# Altium PCB praline.PcbDoc (part 1 of 8)
Units mm, origin at the board's own origin, x right, y up, seen from the top; angles counter-clockwise.
Board outline 152.4 x 101.6 mm, 6 copper layers (In2.Cu, F.Cu, B.Cu, In1.Cu, In3.Cu, In4.Cu); 581 components, 490 nets, 2812 pads, 953 vias.
Unrouted connection lines stored in the file: 404.
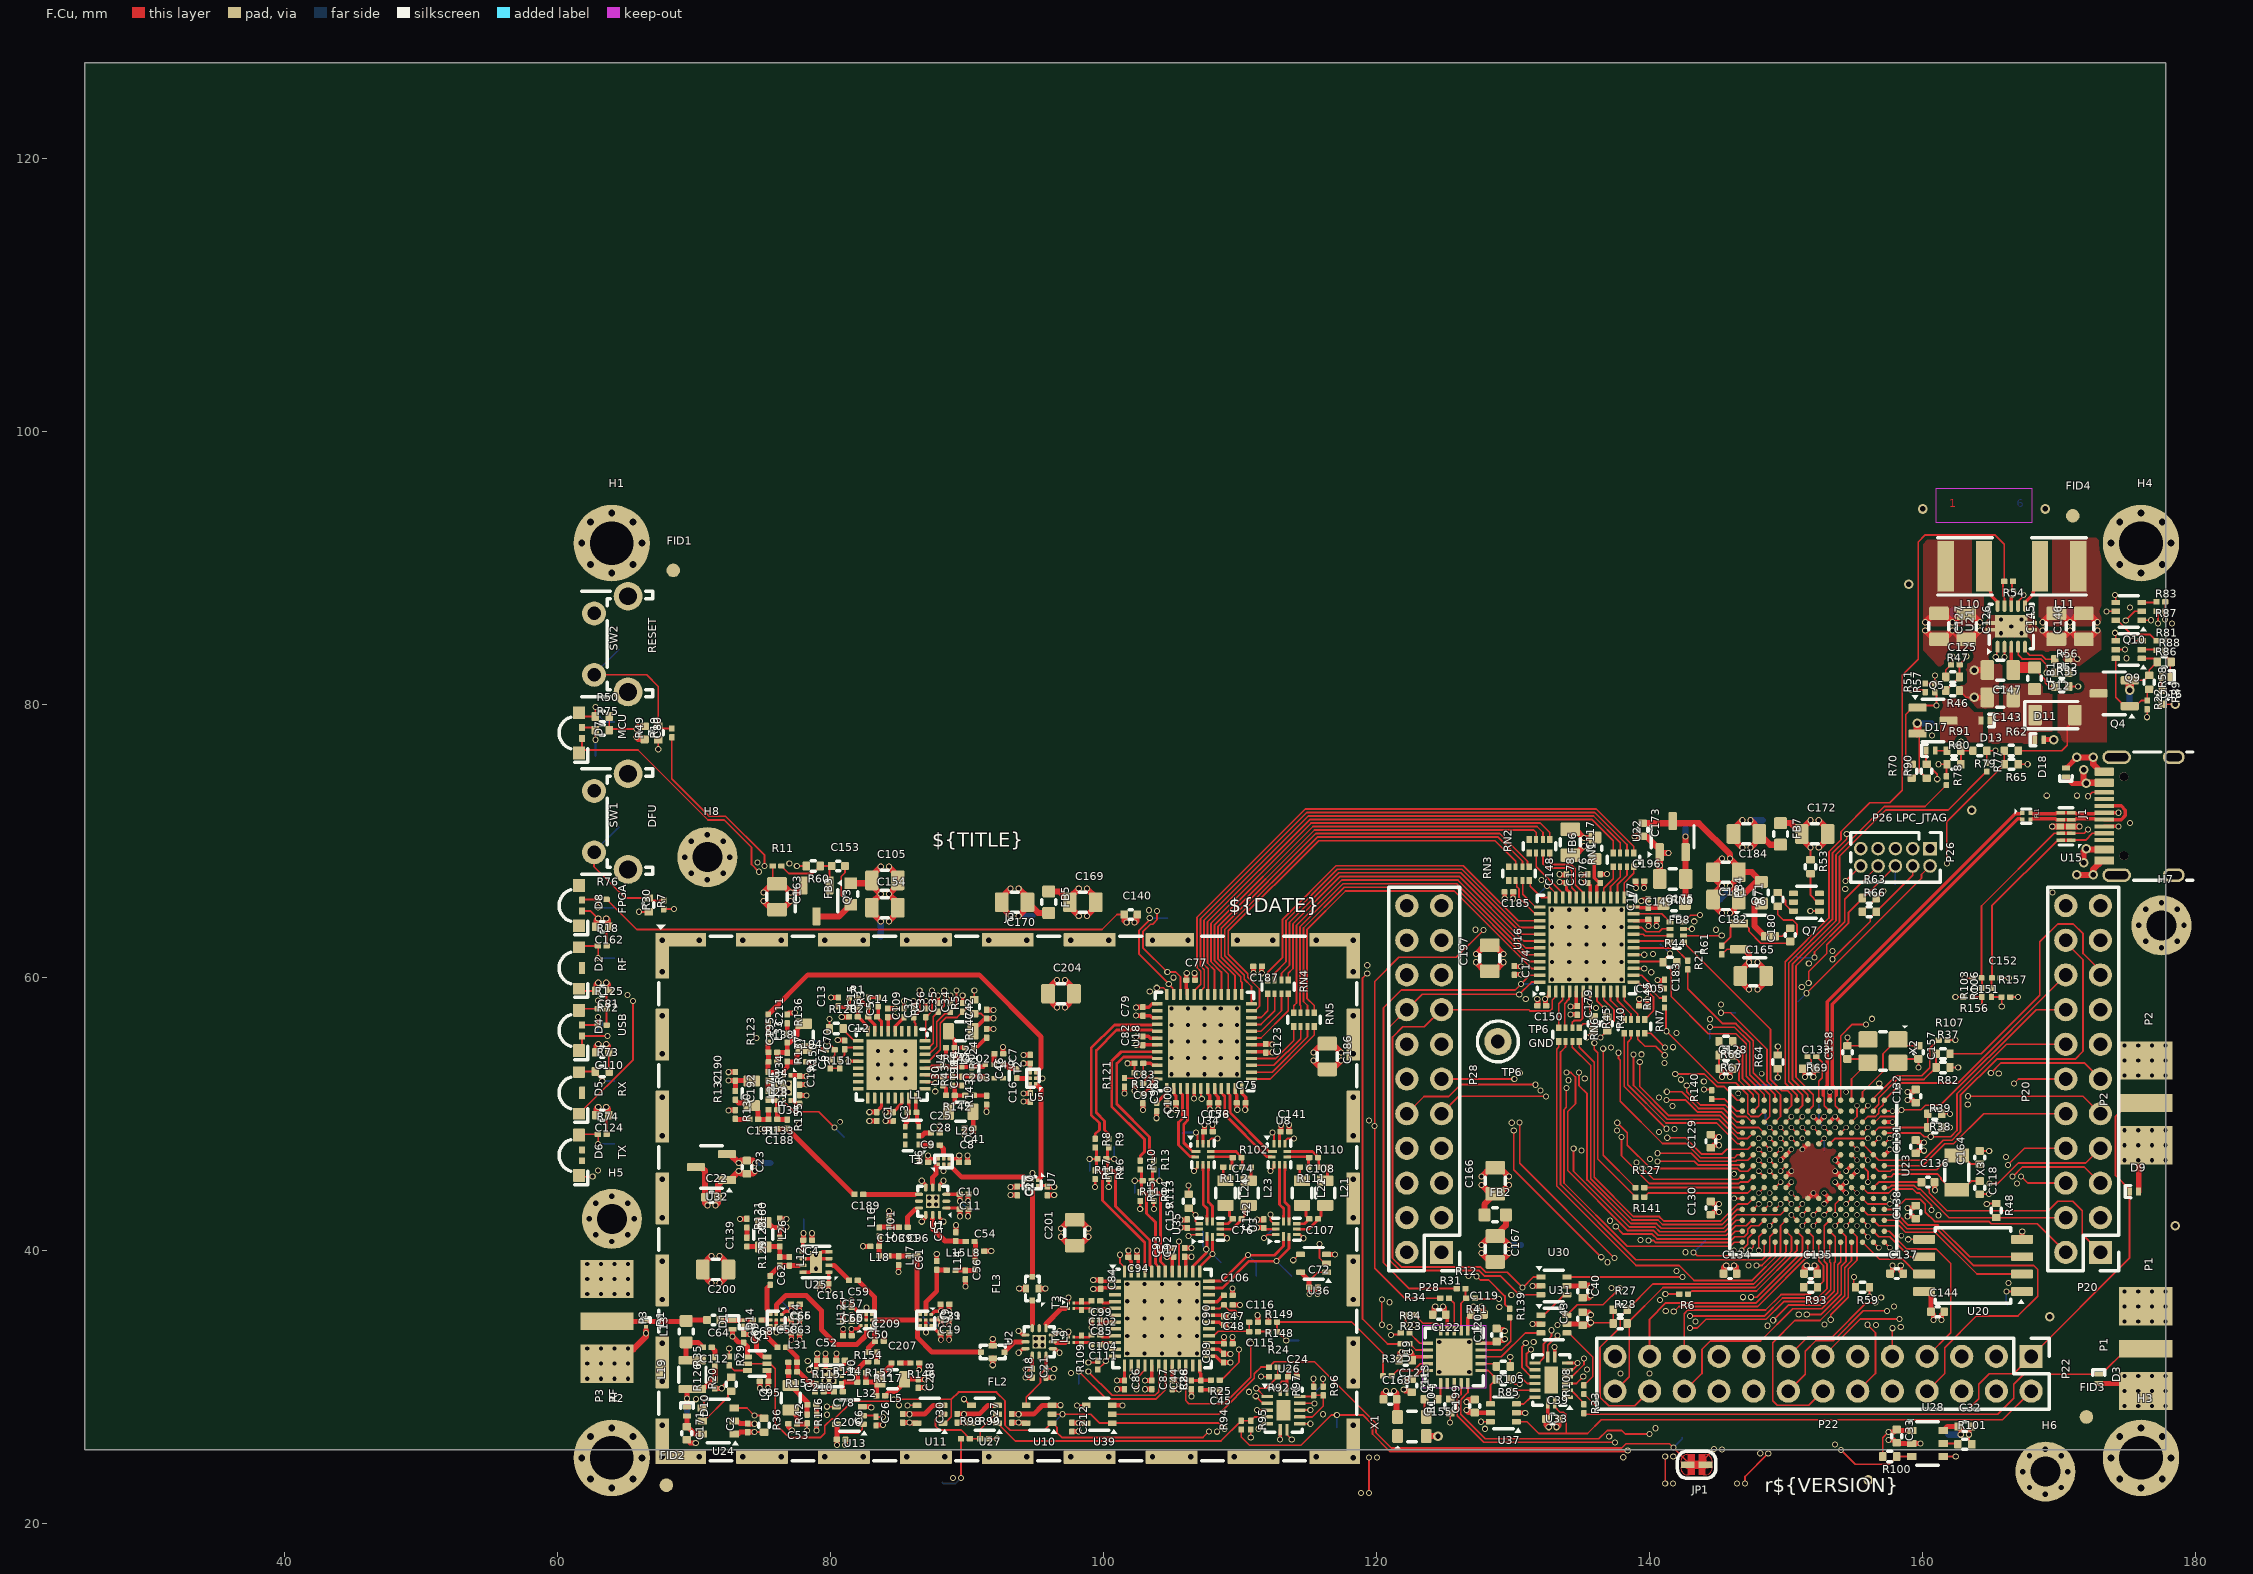
[diagram p0: F.Cu view]
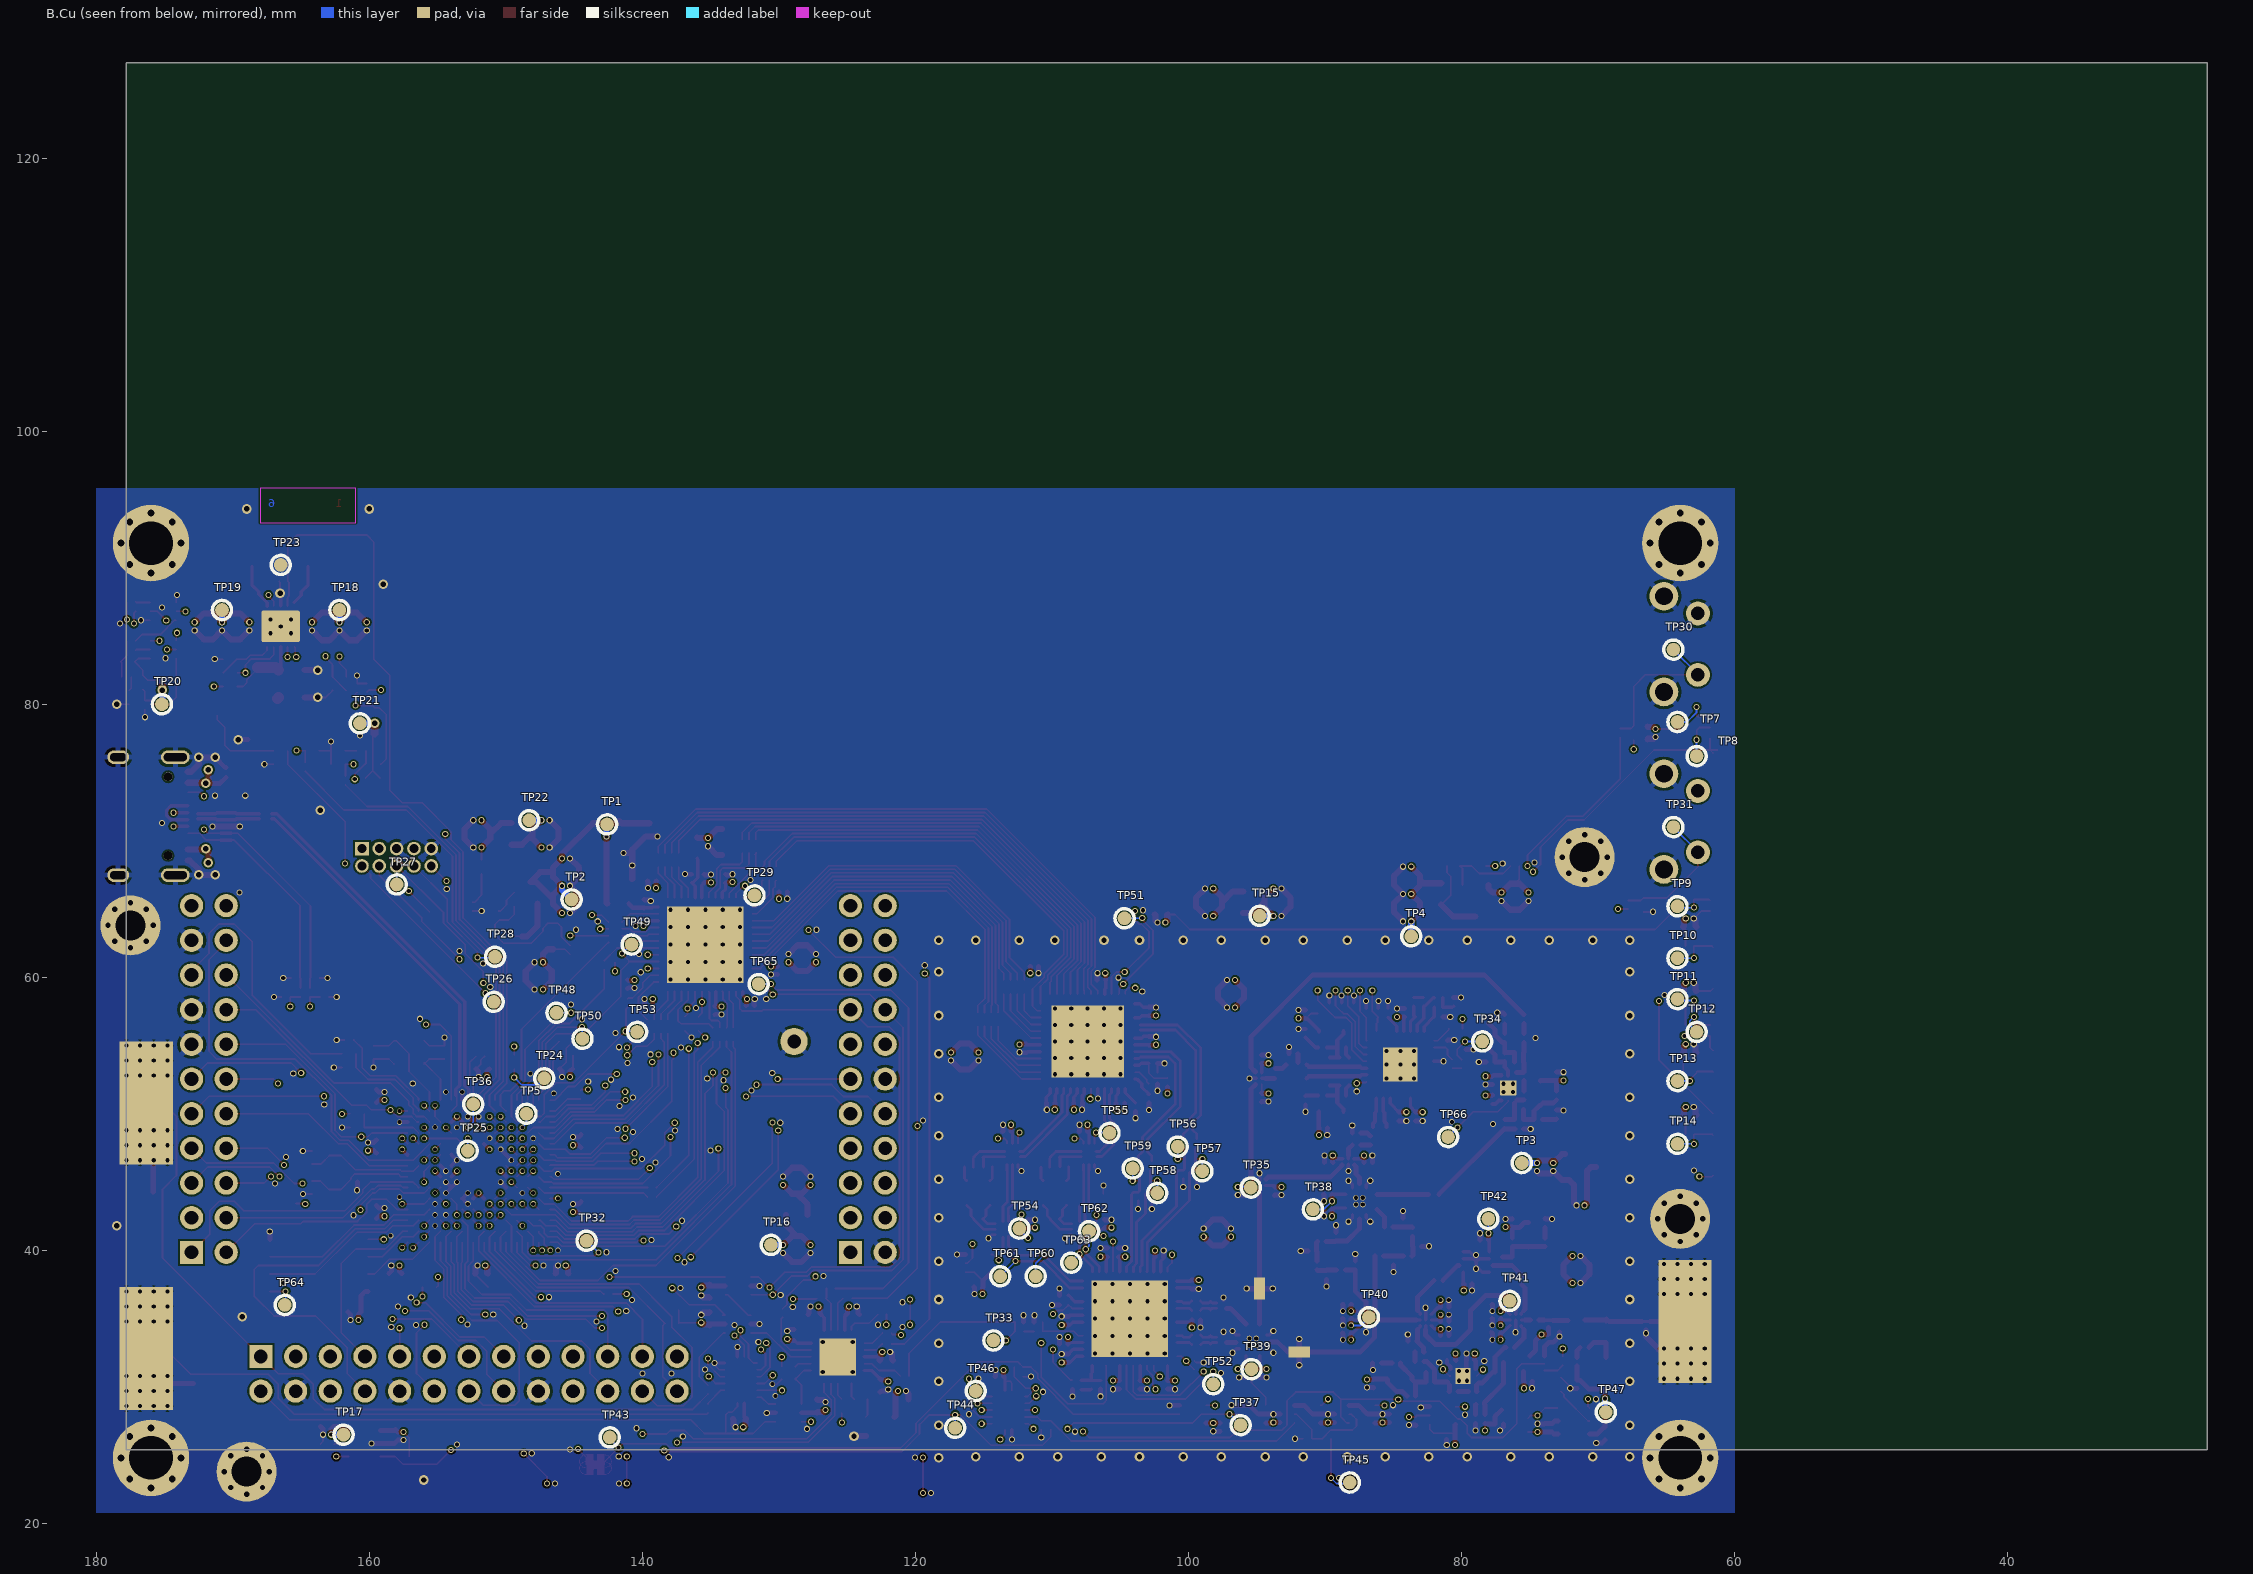
[diagram p1: B.Cu view, seen from below]
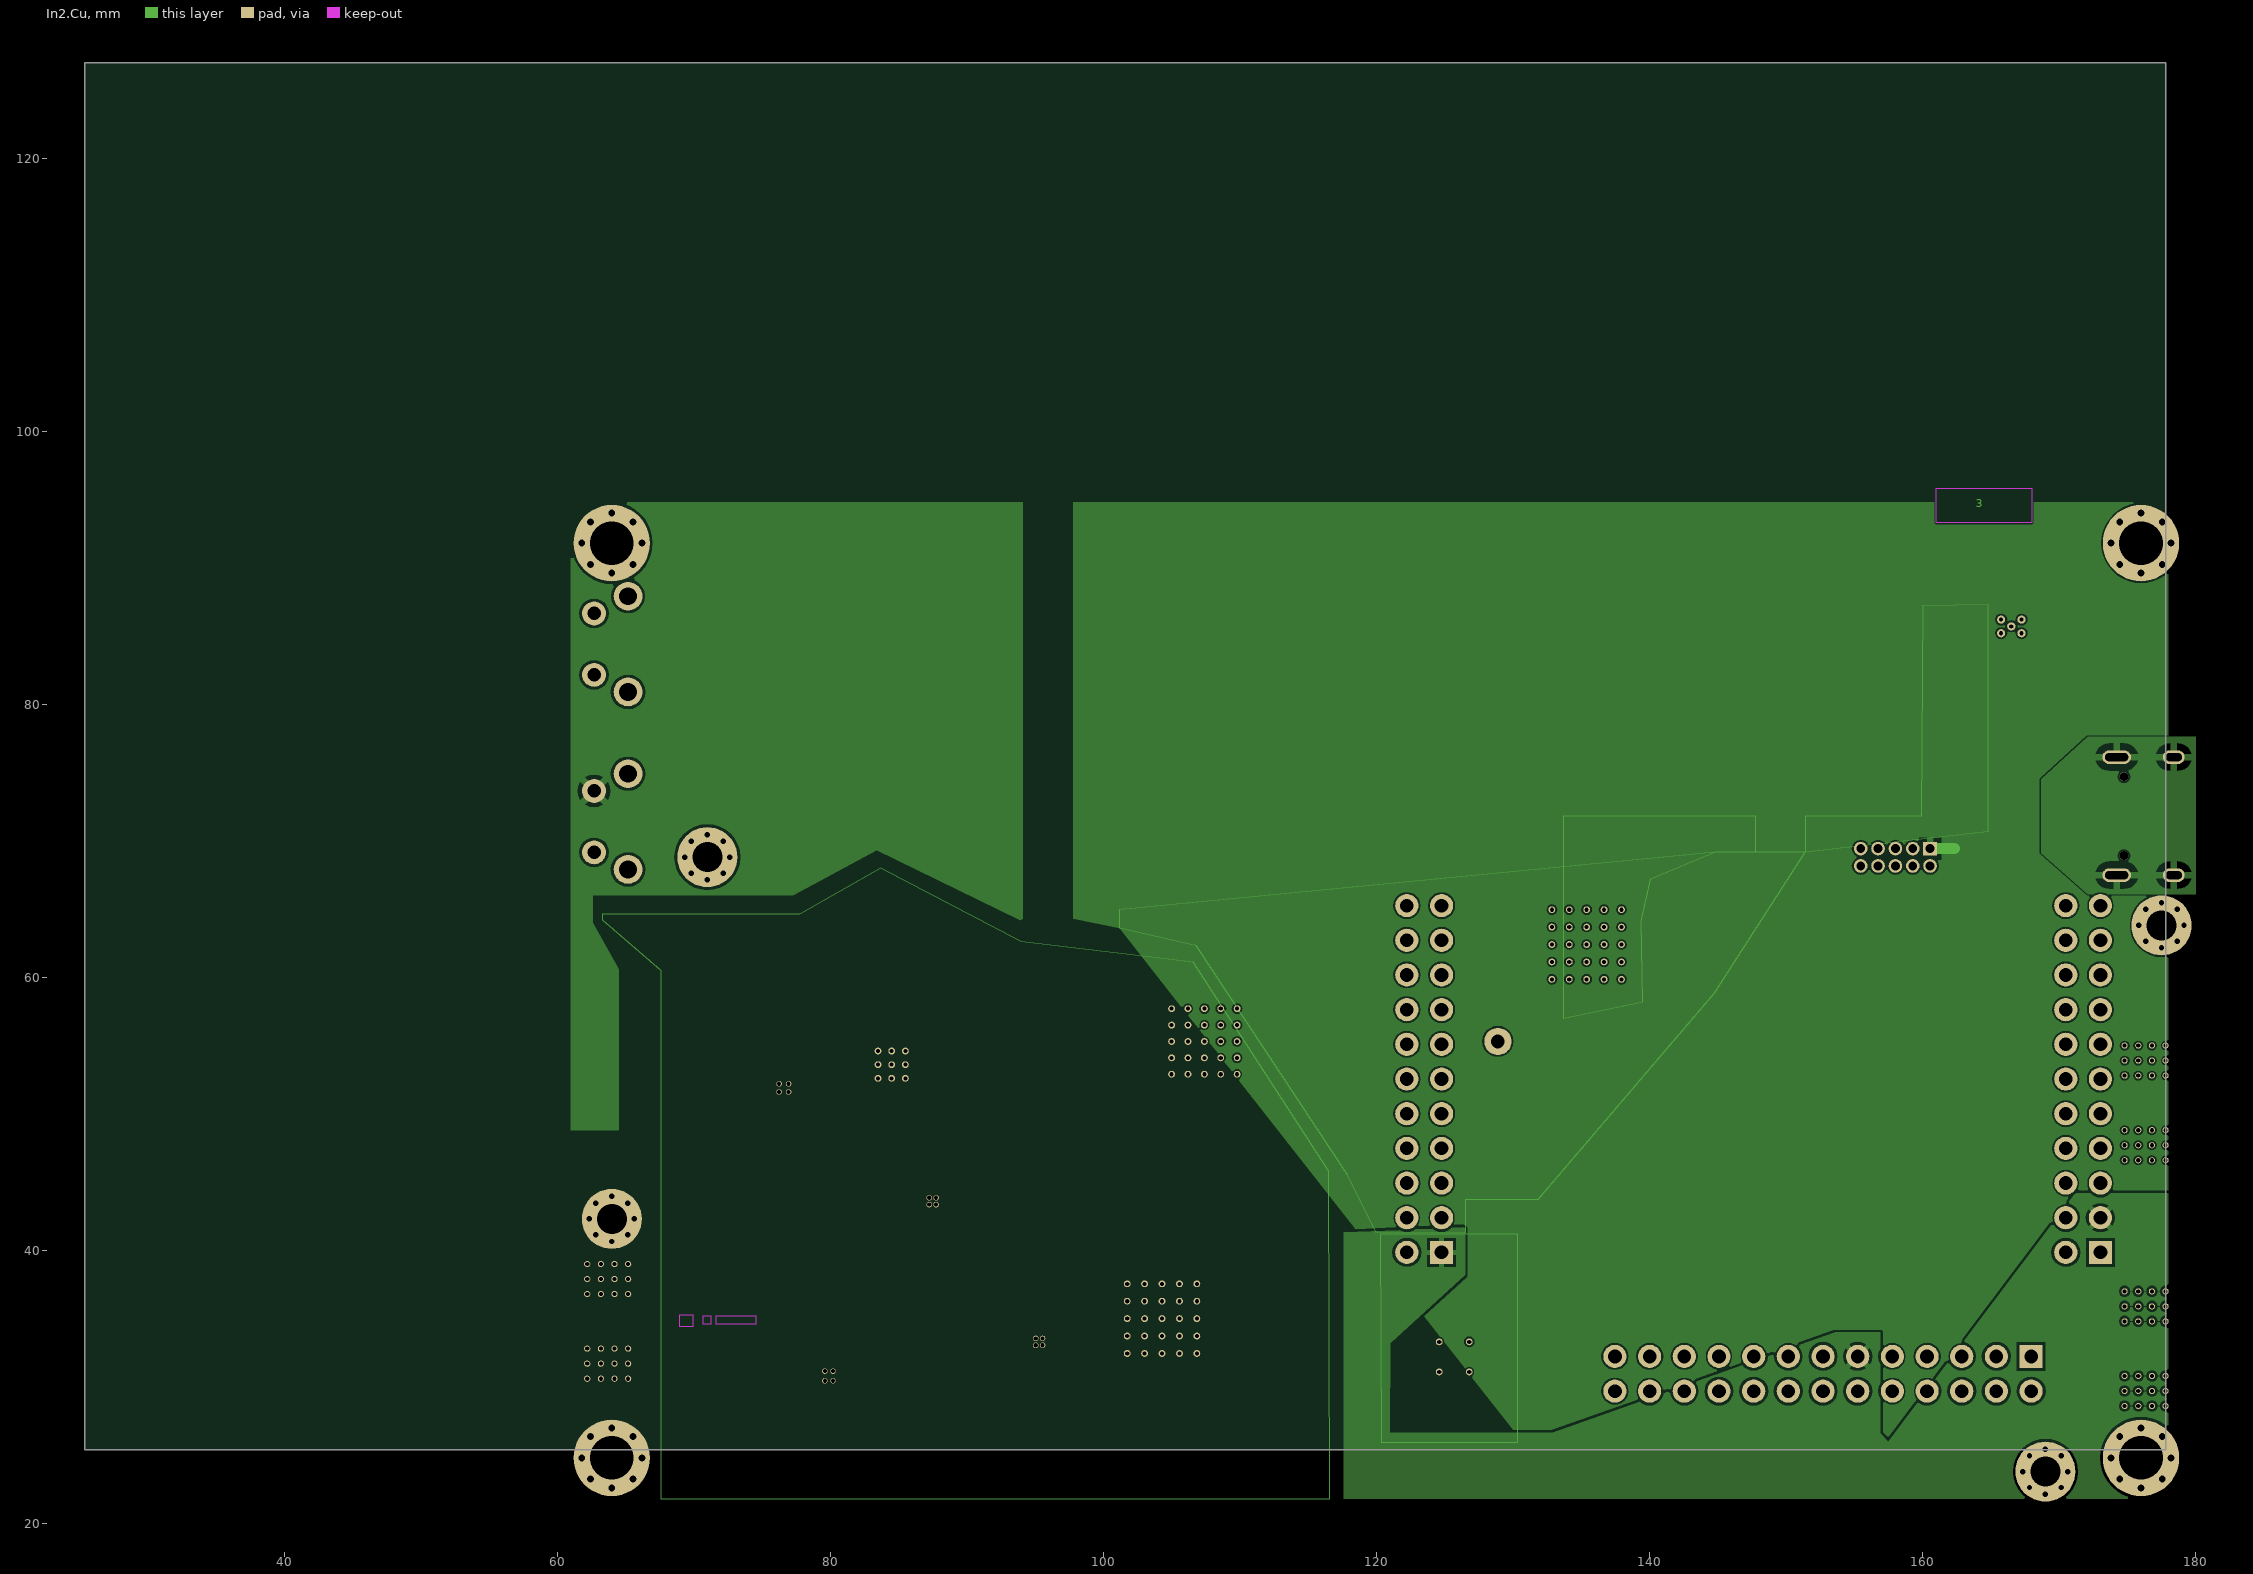
[diagram p2: In2.Cu]
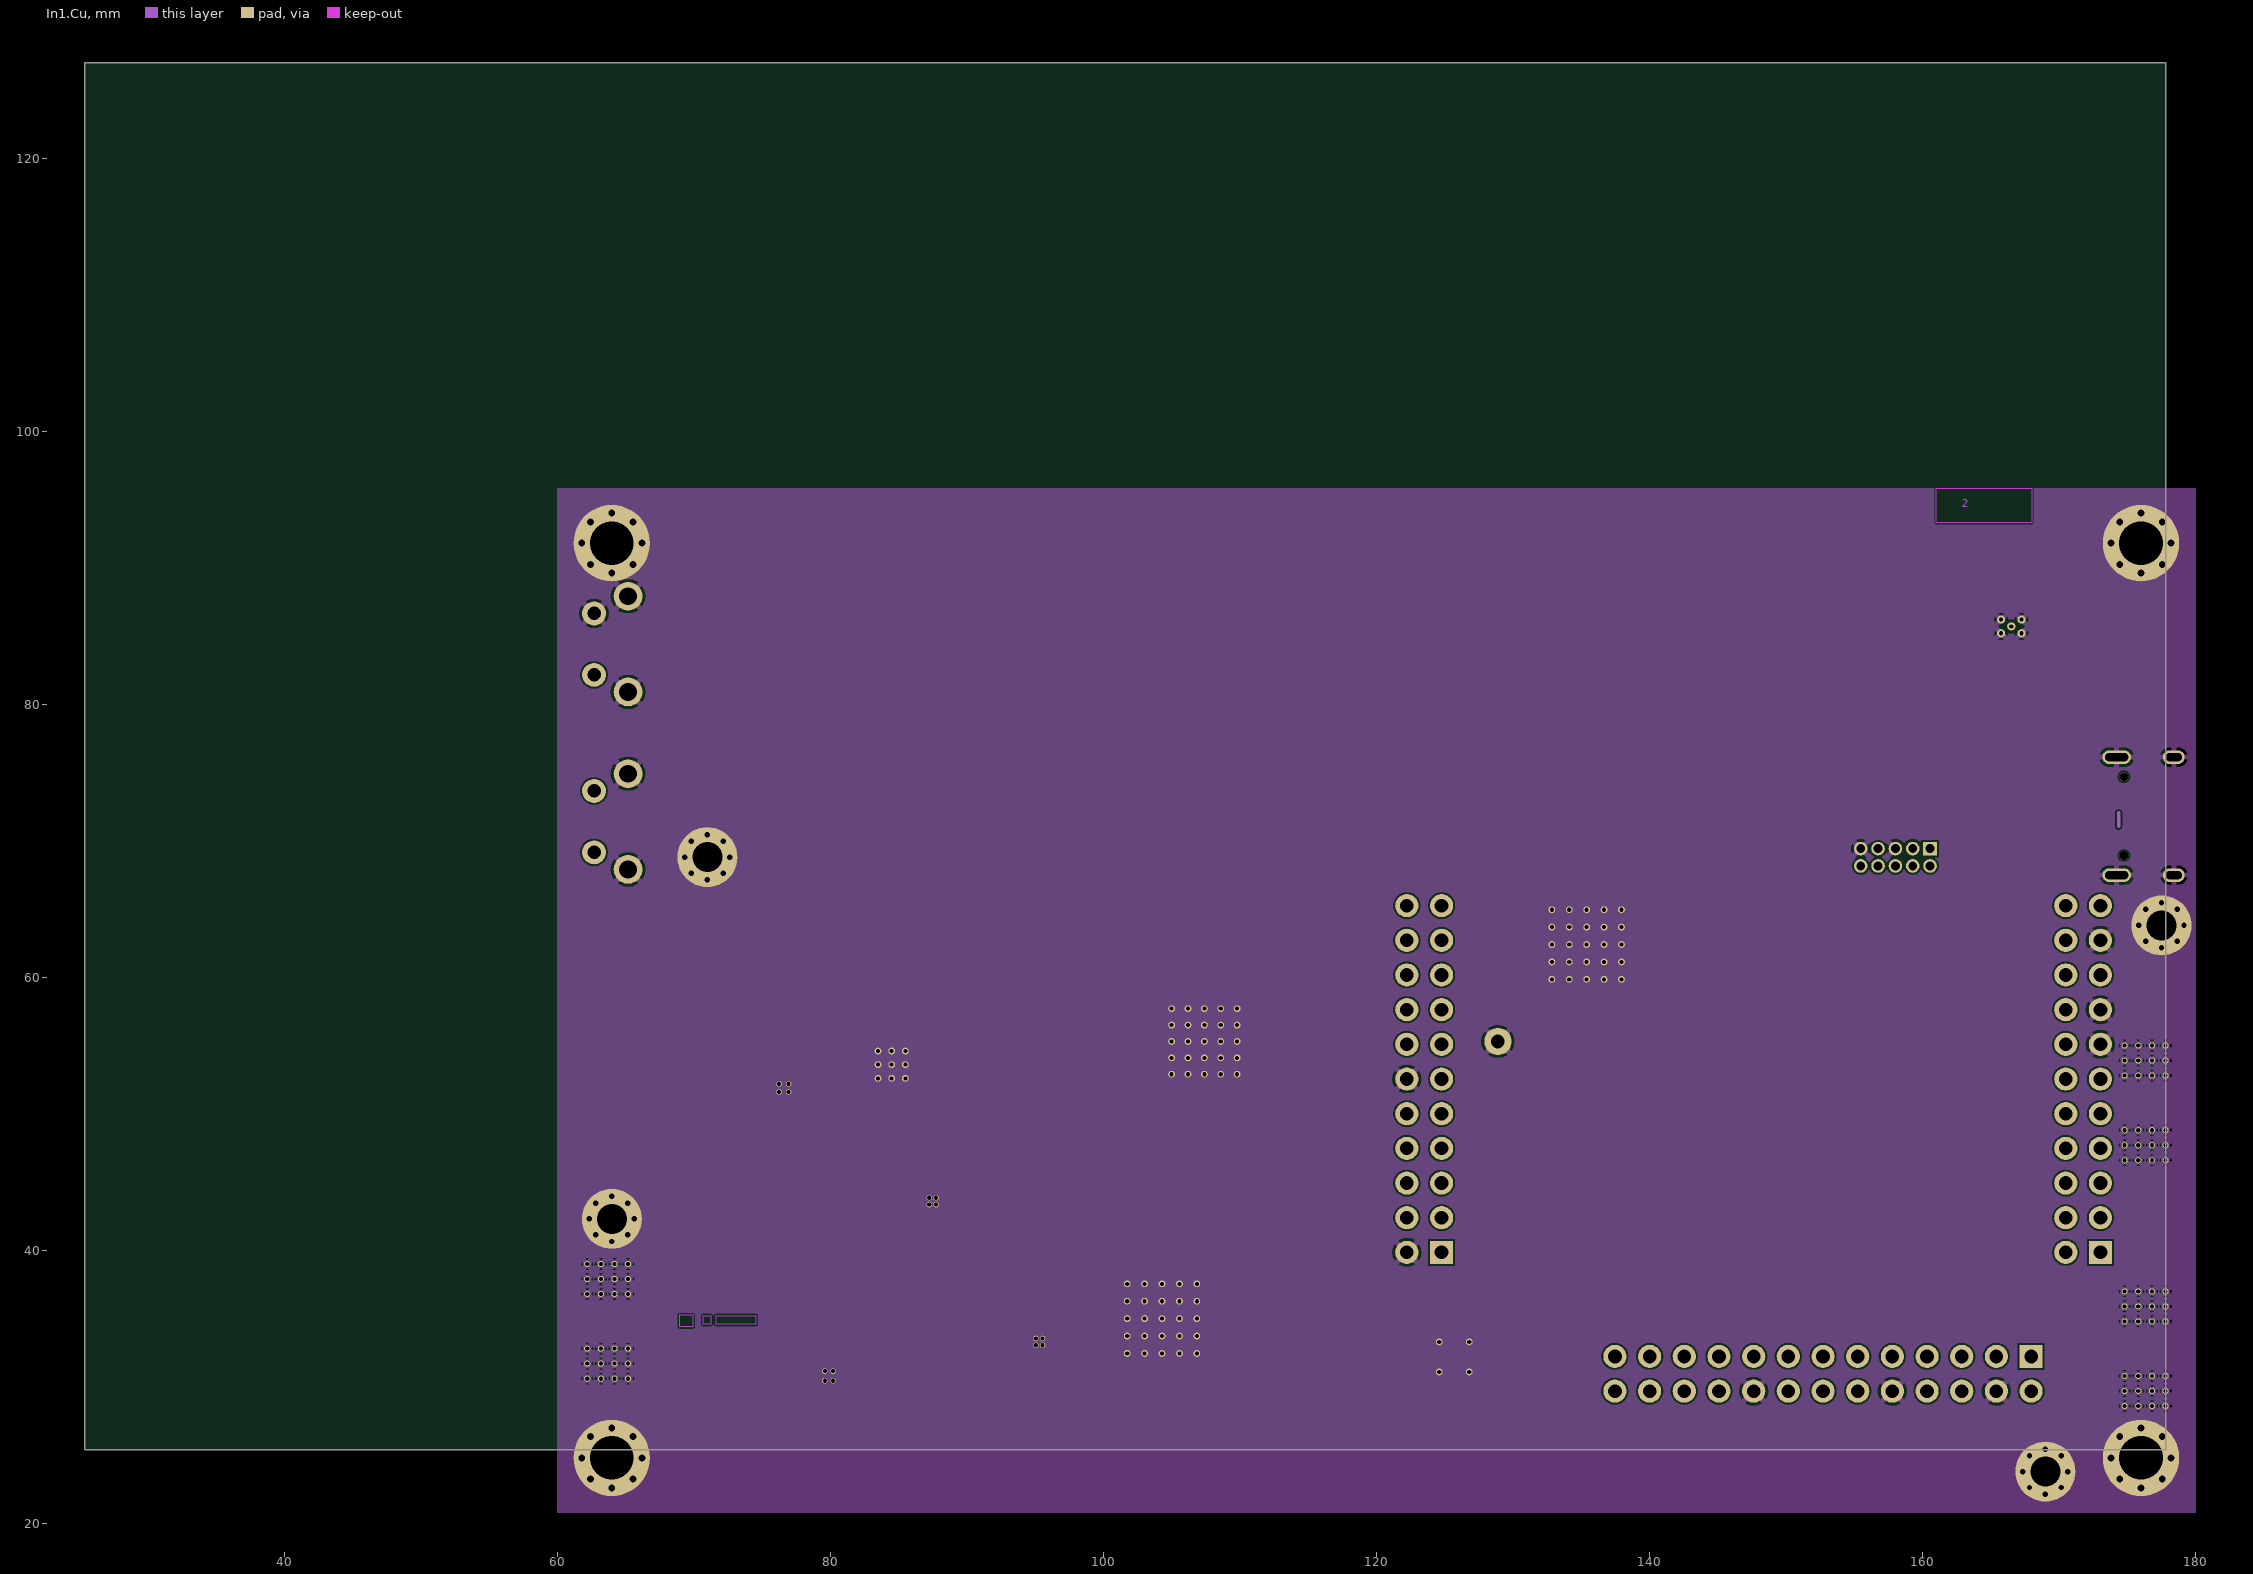
[diagram p3: In1.Cu]
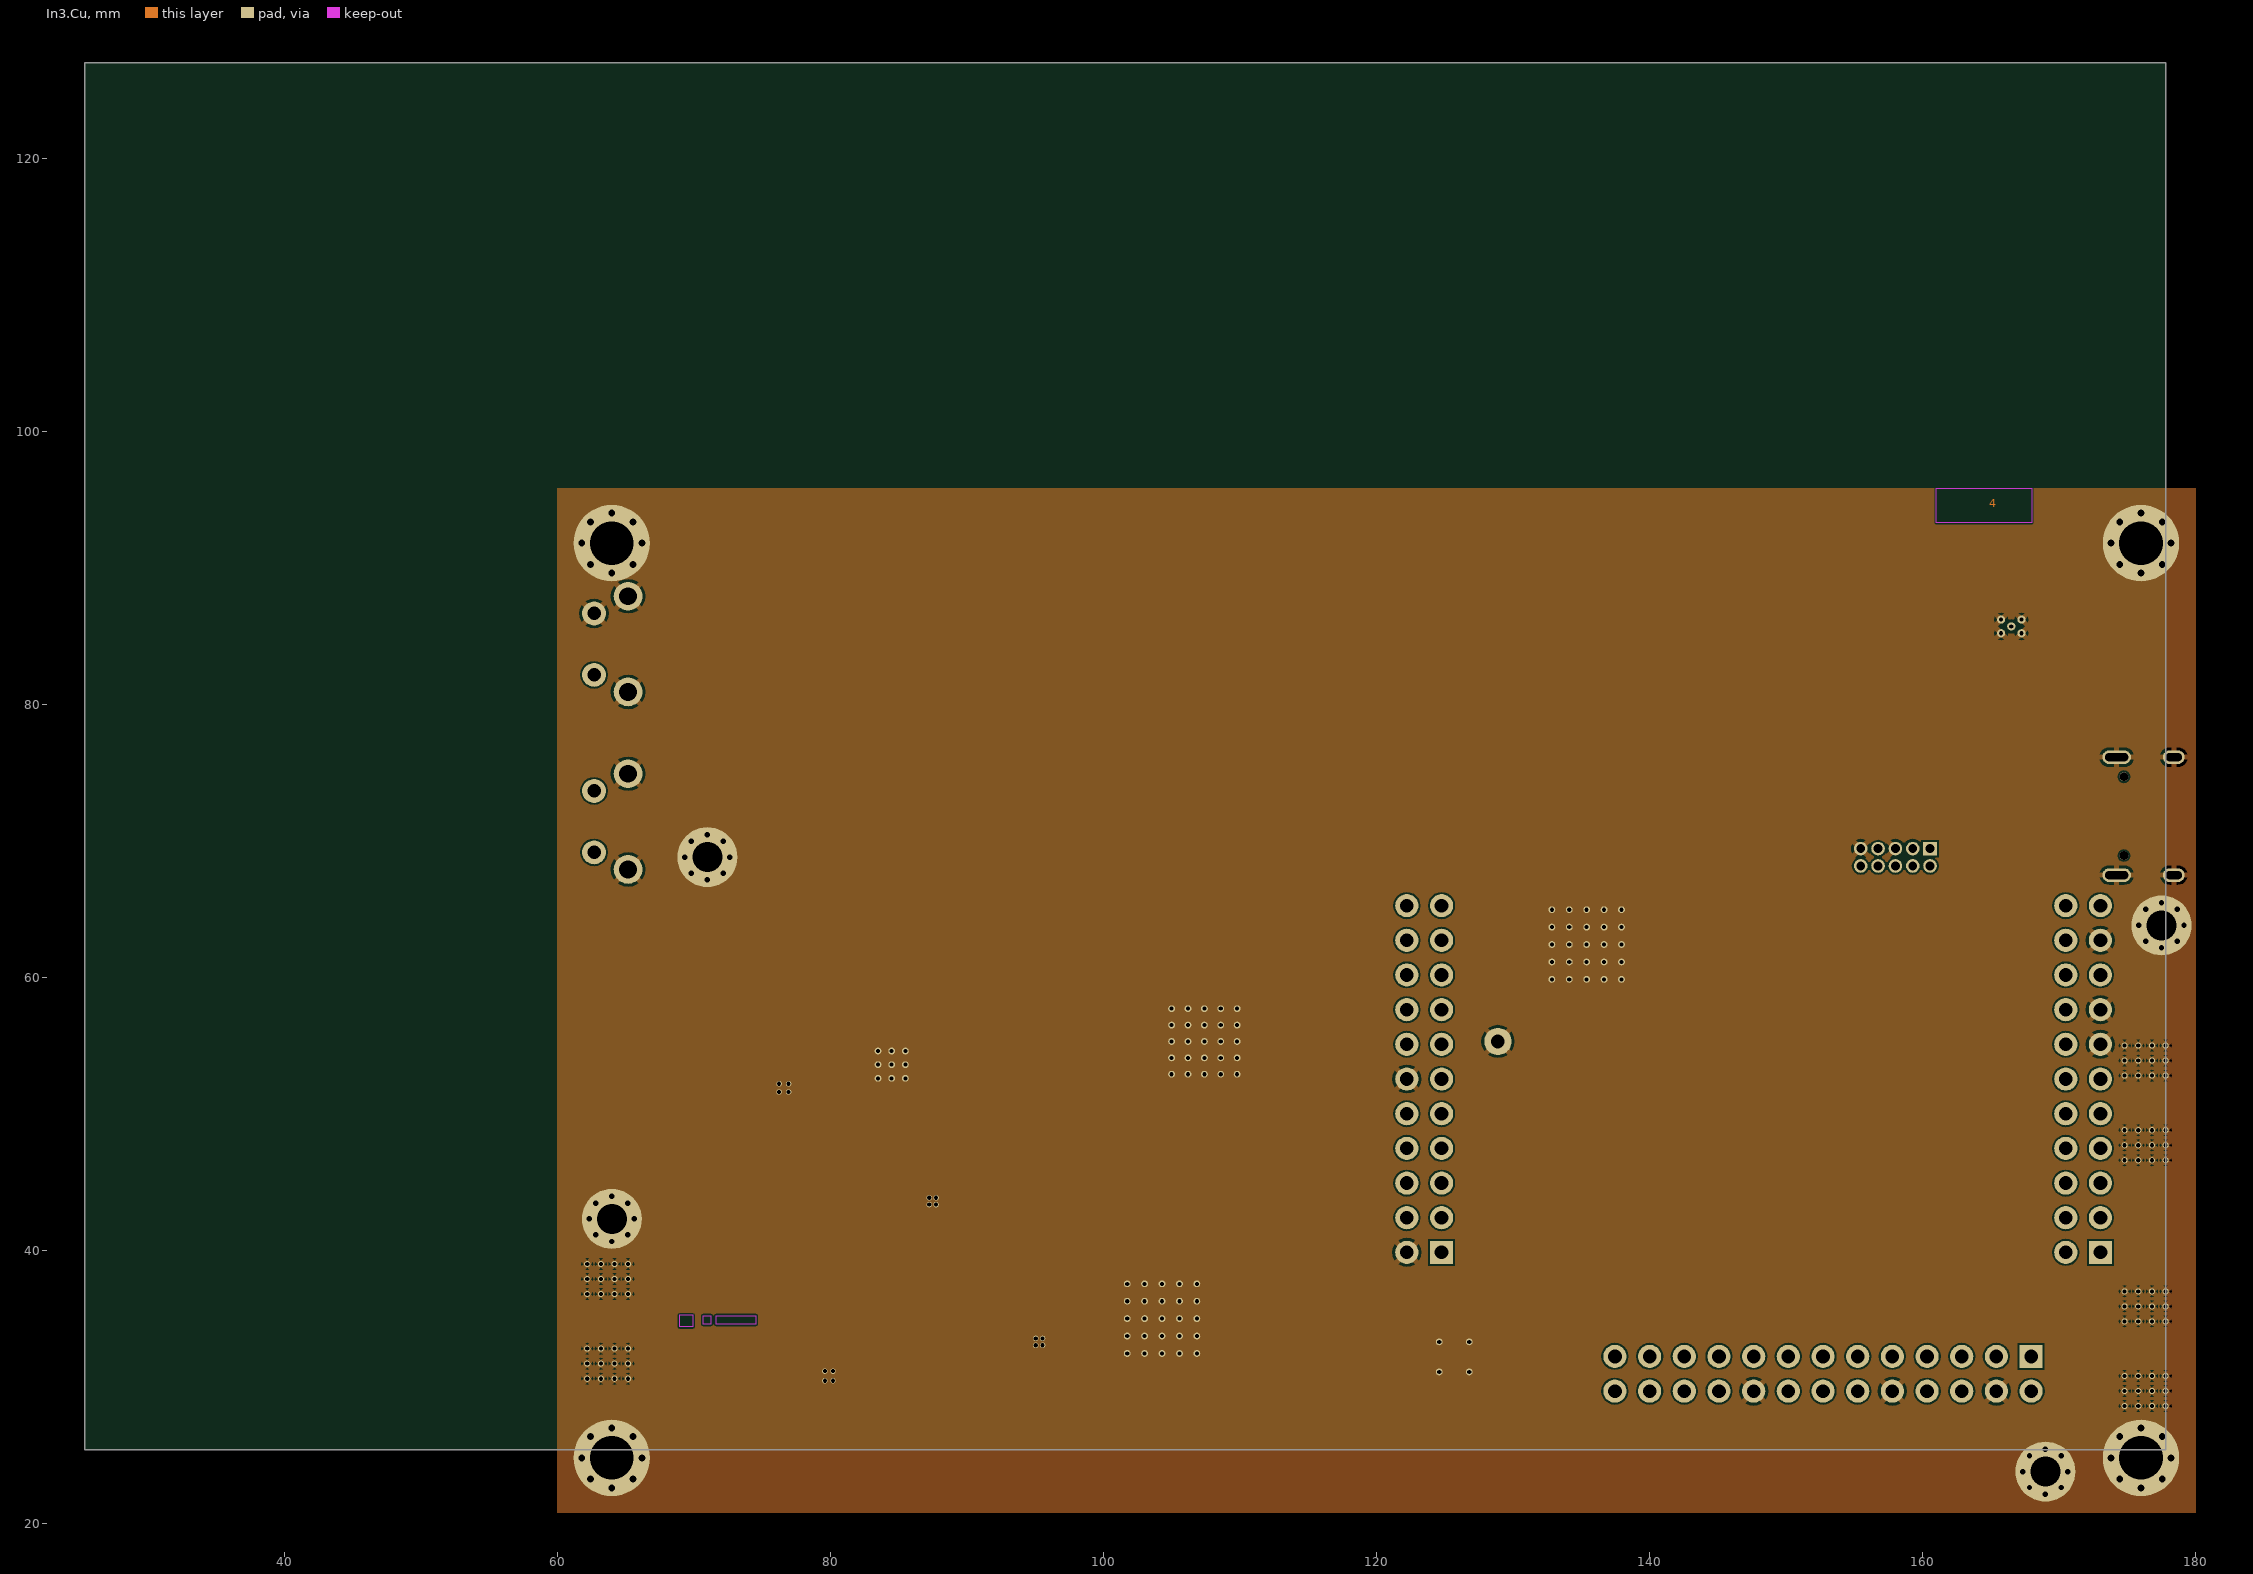
[diagram p4: In3.Cu]
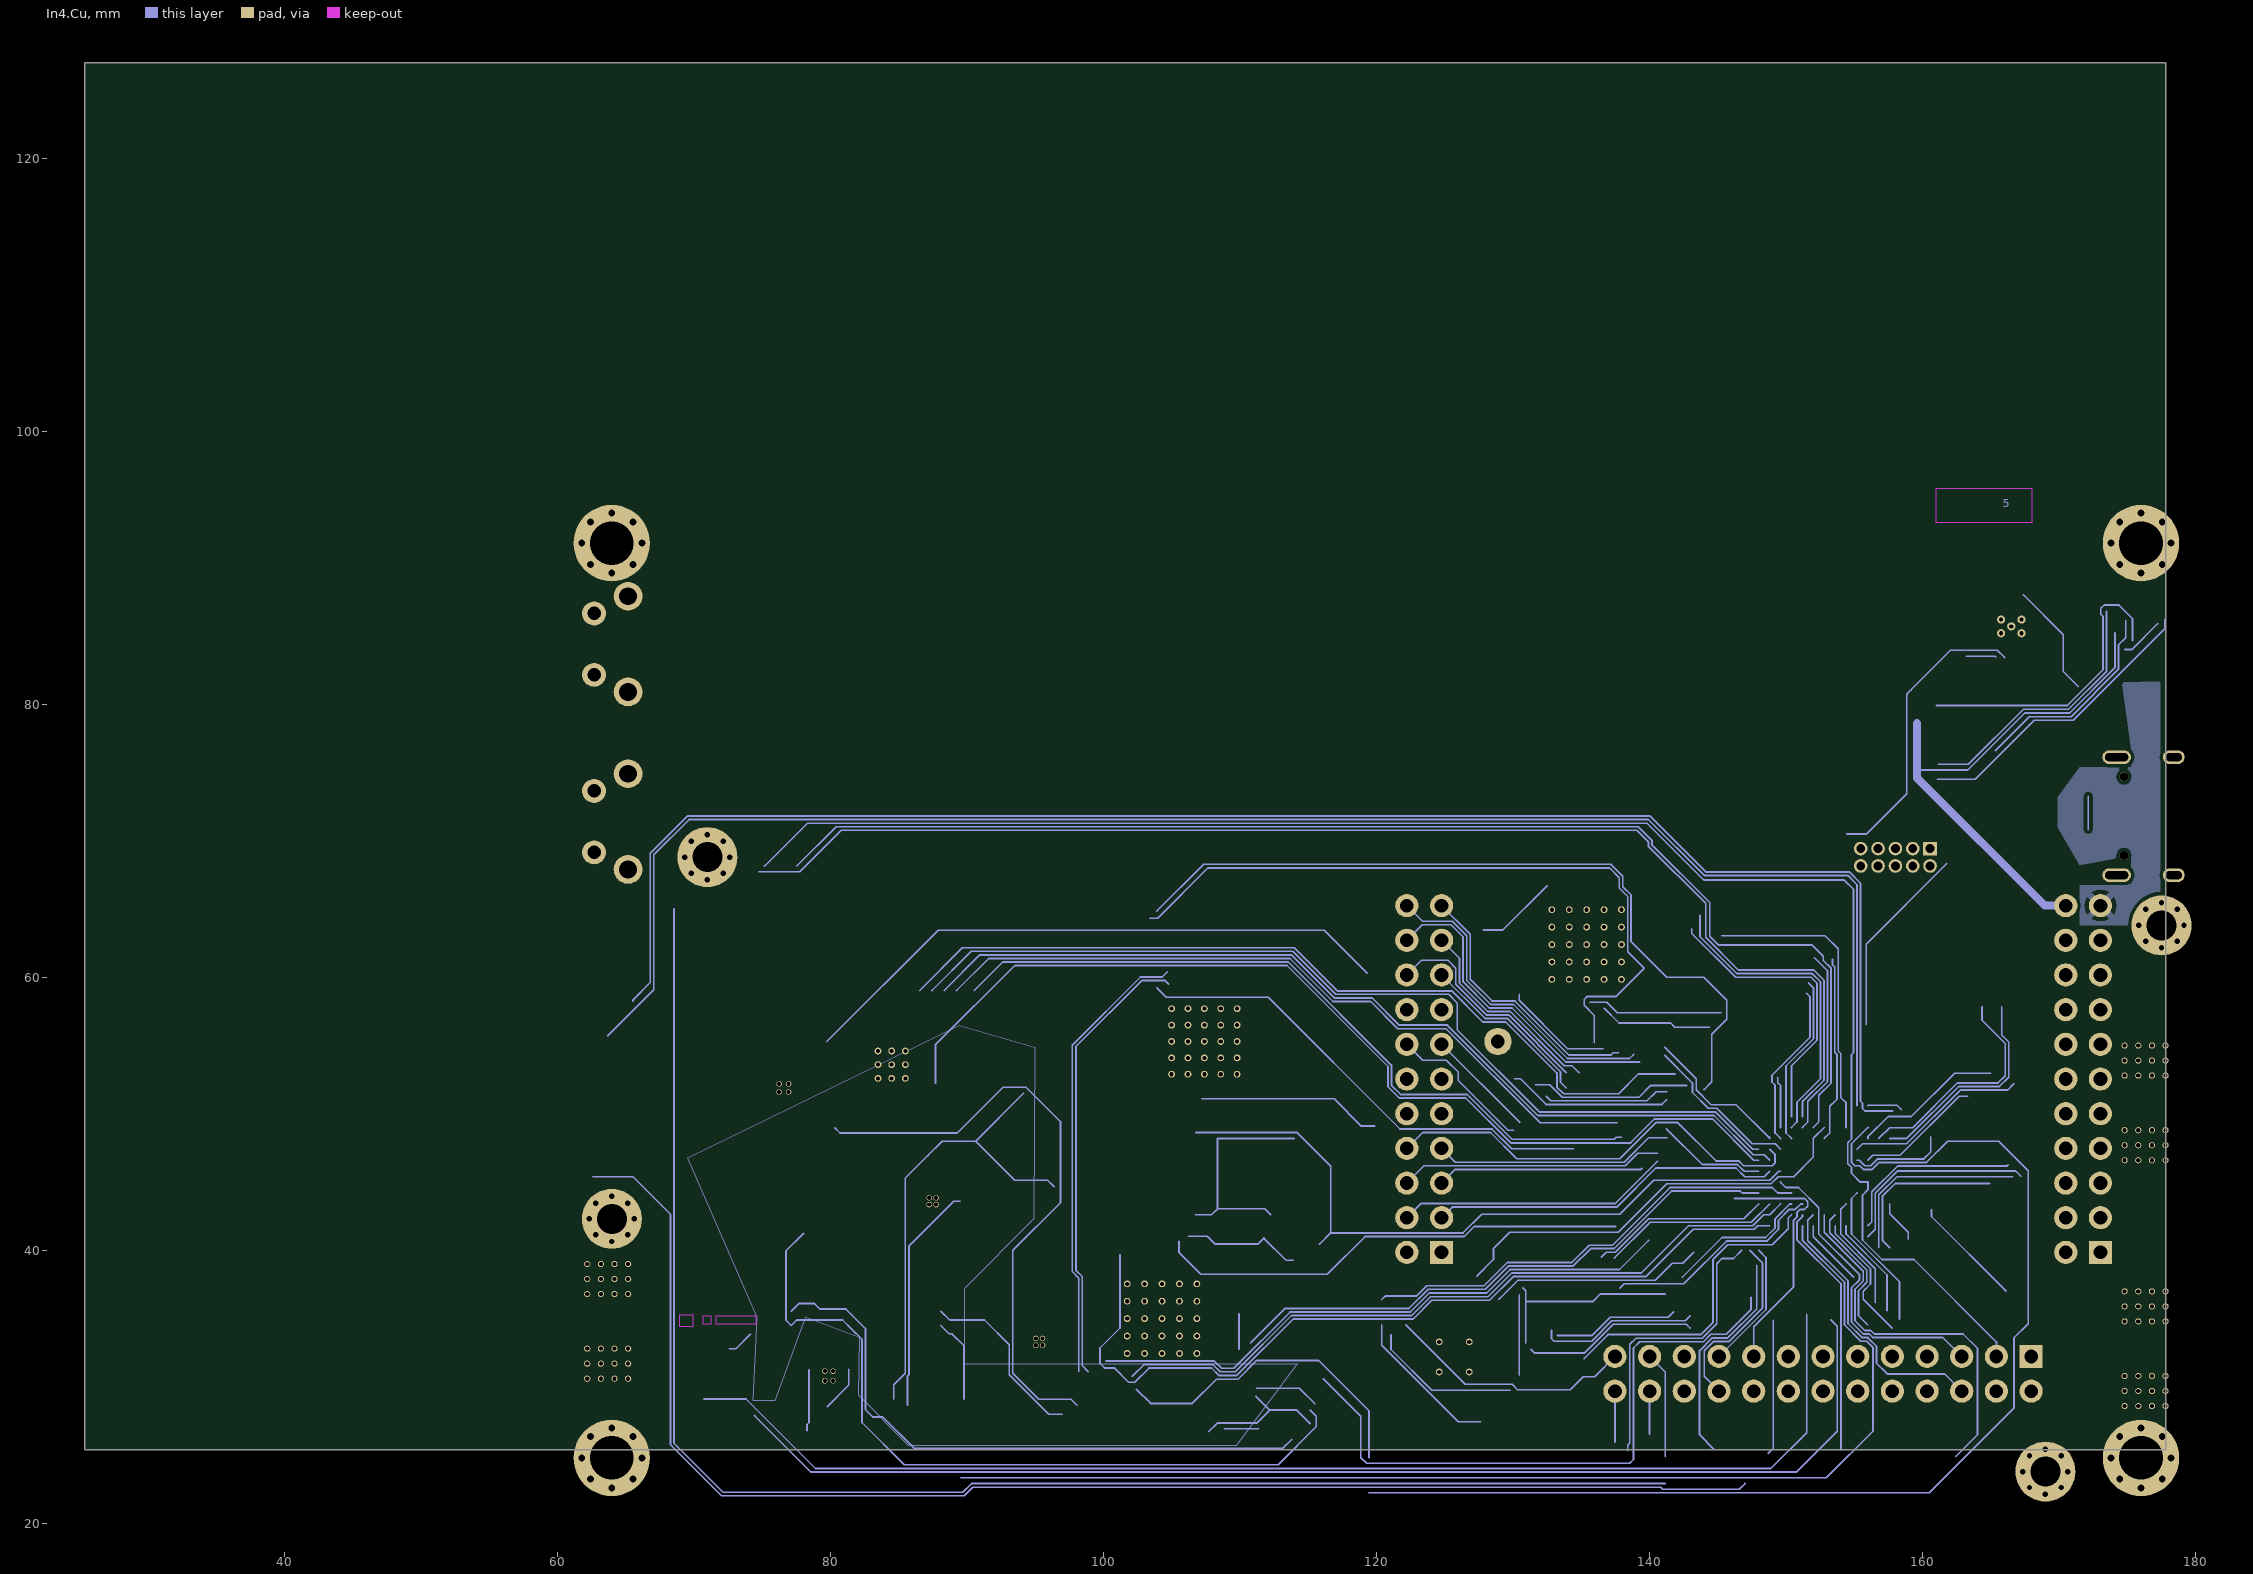
[diagram p5: In4.Cu]

## Layer stack, top to bottom
In2.Cu: signal copper 0.0356
Dielectric3: dielectric 0.32, FR-4, Dk 4.8
F.Mask: solder mask 0.0102, Solder Resist, Dk 3.5
F.Cu: signal copper 0.0356
Dielectric 1: dielectric 0.32, FR-4, Dk 4.8
B.Cu: signal copper 0.0356
B.Mask: solder mask 0.0102, Solder Resist, Dk 3.5
In1.Cu: signal copper 0.0356
Dielectric2: dielectric 0.32, FR-4, Dk 4.8
In3.Cu: signal copper 0.0356
Dielectric4: dielectric 0.32, FR-4, Dk 4.8
In4.Cu: signal copper 0.0356
Dielectric5: dielectric 0.32, FR-4, Dk 4.8

## Board outline
25.4,25.4 177.8,25.4 177.8,127 25.4,127

## Design rules (kind name [scope] priority, off if disabled: settings)
Clearance "Clearence 0.5_PadClass" [InPadClass('Pad Class Clearance 0.5')] p1: gap=0.5 ignorepadtopadclearanceinfootprint=FALSE
Clearance "Clearence 0.3_Polygon" [InNamedPolygon('F.Cu-VCC') OR InNamedPolygon('F.Cu-+1V2') OR InNamedPolygon('F.Cu-GND')] p2: gap=0.3 ignorepadtopadclearanceinfootprint=FALSE
Clearance "Clearence 0.25_Polygon" [InNamedPolygon('F.Cu-Net-(D13-A)') OR InNamedPolygon('F.Cu-Net-(D11-K)') OR InNamedPolygon('F.Cu-/Microcontroller/VBUS_SAFE') OR InNamedPolygon('In4.Cu-/Power/VBUS')] p3: gap=0.25 ignorepadtopadclearanceinfootprint=FALSE
Clearance "Clearence 0.2_Polygon" [InNamedPolygon('F.Cu-VCC-1') OR InNamedPolygon('In2.Cu-3V3AUX') OR InNamedPolygon('In2.Cu-+1V2') OR InNamedPolygon('In2.Cu-3V3LED') OR InNamedPolygon('In2.Cu-1V2FPGA') OR InNamedPolygon('In2.Cu-3V3CLK') OR InNamedPolygon('In2.Cu-3V3FPGA') OR InNamedPolygon('In4.Cu-2V5RF')] p4: gap=0.2 ignorepadtopadclearanceinfootprint=FALSE
Clearance "Clearence 0.127_Polygon" [InNamedPolygon('B.Cu-GND') OR InNamedPolygon('In1.Cu-GND') OR InNamedPolygon('In3.Cu-GND') OR InNamedPolygon('In2.Cu-VCC') OR InNamedPolygon('In2.Cu-VAA') OR InNamedPolygon('In2.Cu-GND')] p5: gap=0.127 ignorepadtopadclearanceinfootprint=FALSE
Clearance "Clearence 0.127_NetClass" [InNetClass('Default') OR InNetClass('diff100') OR InNetClass('diff90')] p6: gap=0.127 ignorepadtopadclearanceinfootprint=FALSE
Clearance "Clearence 0.05_PadClass" [InPadClass('Pad Class Clearance 0.05')] p7: gap=0.05 ignorepadtopadclearanceinfootprint=FALSE
Clearance "Clearence 0.04_PadClass" [InPadClass('Pad Class Clearance 0.04')] p8: gap=0.04 ignorepadtopadclearanceinfootprint=FALSE
MinimumSolderMaskSliver [All] p1: minsoldermaskwidth=0
PolygonConnect Polygon_In4.Cu-2V5RF_ConnectDirect [IsNamedPolygon('In4.Cu-2V5RF') vs IsVia or IsSMTPin] p1: connectstyle=Direct reliefconductorwidth=0.254 reliefentries=4 polygonreliefangle="90 Angle" airgapwidth=0.254
PolygonConnect Polygon_In4.Cu-2V5RF_ConnectRelief45 [IsNamedPolygon('In4.Cu-2V5RF') vs IsThruPin and (PadShape_AllLayers = 'Round')] p2: connectstyle=Relief reliefconductorwidth=0.5 reliefentries=4 polygonreliefangle="45 Angle" airgapwidth=0.5
PolygonConnect Polygon_In4.Cu-2V5RF_ConnectRelief90 [IsNamedPolygon('In4.Cu-2V5RF') vs IsThruPin and (PadShape_AllLayers <> 'Round')] p3: connectstyle=Relief reliefconductorwidth=0.5 reliefentries=4 polygonreliefangle="90 Angle" airgapwidth=0.5
PolygonConnect Polygon_In4.Cu-/Power/VBUS_ConnectDirect [IsNamedPolygon('In4.Cu-/Power/VBUS') vs IsVia] p4: connectstyle=Direct reliefconductorwidth=0.254 reliefentries=4 polygonreliefangle="90 Angle" airgapwidth=0.254
PolygonConnect Polygon_In4.Cu-/Power/VBUS_ConnectRelief45 [IsNamedPolygon('In4.Cu-/Power/VBUS') vs (IsThruPin or IsSMTPin) and (PadShape_AllLayers = 'Round')] p5: connectstyle=Relief reliefconductorwidth=0.5 reliefentries=4 polygonreliefangle="45 Angle" airgapwidth=0.3
PolygonConnect Polygon_In4.Cu-/Power/VBUS_ConnectRelief90 [IsNamedPolygon('In4.Cu-/Power/VBUS') vs (IsThruPin or IsSMTPin) and (PadShape_AllLayers <> 'Round')] p6: connectstyle=Relief reliefconductorwidth=0.5 reliefentries=4 polygonreliefangle="90 Angle" airgapwidth=0.3
PolygonConnect Polygon_In2.Cu-3V3FPGA_ConnectDirect [IsNamedPolygon('In2.Cu-3V3FPGA') vs IsVia] p7: connectstyle=Direct reliefconductorwidth=0.254 reliefentries=4 polygonreliefangle="90 Angle" airgapwidth=0.254
PolygonConnect Polygon_In2.Cu-3V3FPGA_ConnectRelief45 [IsNamedPolygon('In2.Cu-3V3FPGA') vs (IsThruPin or IsSMTPin) and (PadShape_AllLayers = 'Round')] p8: connectstyle=Relief reliefconductorwidth=0.5 reliefentries=4 polygonreliefangle="45 Angle" airgapwidth=0.5
PolygonConnect Polygon_In2.Cu-3V3FPGA_ConnectRelief90 [IsNamedPolygon('In2.Cu-3V3FPGA') vs (IsThruPin or IsSMTPin) and (PadShape_AllLayers <> 'Round')] p9: connectstyle=Relief reliefconductorwidth=0.5 reliefentries=4 polygonreliefangle="90 Angle" airgapwidth=0.5
PolygonConnect Polygon_In2.Cu-3V3CLK_ConnectDirect [IsNamedPolygon('In2.Cu-3V3CLK') vs IsVia] p10: connectstyle=Direct reliefconductorwidth=0.254 reliefentries=4 polygonreliefangle="90 Angle" airgapwidth=0.254
PolygonConnect Polygon_In2.Cu-3V3CLK_ConnectRelief45 [IsNamedPolygon('In2.Cu-3V3CLK') vs (IsThruPin or IsSMTPin) and (PadShape_AllLayers = 'Round')] p11: connectstyle=Relief reliefconductorwidth=0.5 reliefentries=4 polygonreliefangle="45 Angle" airgapwidth=0.5
PolygonConnect Polygon_In2.Cu-3V3CLK_ConnectRelief90 [IsNamedPolygon('In2.Cu-3V3CLK') vs (IsThruPin or IsSMTPin) and (PadShape_AllLayers <> 'Round')] p12: connectstyle=Relief reliefconductorwidth=0.5 reliefentries=4 polygonreliefangle="90 Angle" airgapwidth=0.5
PolygonConnect Polygon_In2.Cu-1V2FPGA_ConnectDirect [IsNamedPolygon('In2.Cu-1V2FPGA') vs IsVia] p13: connectstyle=Direct reliefconductorwidth=0.254 reliefentries=4 polygonreliefangle="90 Angle" airgapwidth=0.254
PolygonConnect Polygon_In2.Cu-1V2FPGA_ConnectRelief45 [IsNamedPolygon('In2.Cu-1V2FPGA') vs (IsThruPin or IsSMTPin) and (PadShape_AllLayers = 'Round')] p14: connectstyle=Relief reliefconductorwidth=0.5 reliefentries=4 polygonreliefangle="45 Angle" airgapwidth=0.5
PolygonConnect Polygon_In2.Cu-1V2FPGA_ConnectRelief90 [IsNamedPolygon('In2.Cu-1V2FPGA') vs (IsThruPin or IsSMTPin) and (PadShape_AllLayers <> 'Round')] p15: connectstyle=Relief reliefconductorwidth=0.5 reliefentries=4 polygonreliefangle="90 Angle" airgapwidth=0.5
PolygonConnect Polygon_In2.Cu-3V3LED_ConnectDirect [IsNamedPolygon('In2.Cu-3V3LED') vs IsVia] p16: connectstyle=Direct reliefconductorwidth=0.254 reliefentries=4 polygonreliefangle="90 Angle" airgapwidth=0.254
PolygonConnect Polygon_In2.Cu-3V3LED_ConnectRelief45 [IsNamedPolygon('In2.Cu-3V3LED') vs (IsThruPin or IsSMTPin) and (PadShape_AllLayers = 'Round')] p17: connectstyle=Relief reliefconductorwidth=0.508 reliefentries=4 polygonreliefangle="45 Angle" airgapwidth=0.305
PolygonConnect Polygon_In2.Cu-3V3LED_ConnectRelief90 [IsNamedPolygon('In2.Cu-3V3LED') vs (IsThruPin or IsSMTPin) and (PadShape_AllLayers <> 'Round')] p18: connectstyle=Relief reliefconductorwidth=0.508 reliefentries=4 polygonreliefangle="90 Angle" airgapwidth=0.305
PolygonConnect Polygon_In2.Cu-GND_ConnectDirect [IsNamedPolygon('In2.Cu-GND') vs IsVia or IsSMTPin] p19: connectstyle=Direct reliefconductorwidth=0.254 reliefentries=4 polygonreliefangle="90 Angle" airgapwidth=0.254
PolygonConnect Polygon_In2.Cu-GND_ConnectRelief45 [IsNamedPolygon('In2.Cu-GND') vs IsThruPin and (PadShape_AllLayers = 'Round')] p20: connectstyle=Relief reliefconductorwidth=0.5 reliefentries=4 polygonreliefangle="45 Angle" airgapwidth=0.5
PolygonConnect Polygon_In2.Cu-GND_ConnectRelief90 [IsNamedPolygon('In2.Cu-GND') vs IsThruPin and (PadShape_AllLayers <> 'Round')] p21: connectstyle=Relief reliefconductorwidth=0.5 reliefentries=4 polygonreliefangle="90 Angle" airgapwidth=0.5
PolygonConnect Polygon_In2.Cu-+1V2_ConnectDirect [IsNamedPolygon('In2.Cu-+1V2') vs IsVia] p22: connectstyle=Direct reliefconductorwidth=0.254 reliefentries=4 polygonreliefangle="90 Angle" airgapwidth=0.254
PolygonConnect Polygon_In2.Cu-+1V2_ConnectRelief45 [IsNamedPolygon('In2.Cu-+1V2') vs (IsThruPin or IsSMTPin) and (PadShape_AllLayers = 'Round')] p23: connectstyle=Relief reliefconductorwidth=0.5 reliefentries=4 polygonreliefangle="45 Angle" airgapwidth=0.5
PolygonConnect Polygon_In2.Cu-+1V2_ConnectRelief90 [IsNamedPolygon('In2.Cu-+1V2') vs (IsThruPin or IsSMTPin) and (PadShape_AllLayers <> 'Round')] p24: connectstyle=Relief reliefconductorwidth=0.5 reliefentries=4 polygonreliefangle="90 Angle" airgapwidth=0.5
PolygonConnect Polygon_In2.Cu-3V3AUX_ConnectDirect [IsNamedPolygon('In2.Cu-3V3AUX') vs IsVia or IsSMTPin] p25: connectstyle=Direct reliefconductorwidth=0.254 reliefentries=4 polygonreliefangle="90 Angle" airgapwidth=0.254
PolygonConnect Polygon_In2.Cu-3V3AUX_ConnectRelief45 [IsNamedPolygon('In2.Cu-3V3AUX') vs IsThruPin and (PadShape_AllLayers = 'Round')] p26: connectstyle=Relief reliefconductorwidth=0.4 reliefentries=4 polygonreliefangle="45 Angle" airgapwidth=0.2
PolygonConnect Polygon_In2.Cu-3V3AUX_ConnectRelief90 [IsNamedPolygon('In2.Cu-3V3AUX') vs IsThruPin and (PadShape_AllLayers <> 'Round')] p27: connectstyle=Relief reliefconductorwidth=0.4 reliefentries=4 polygonreliefangle="90 Angle" airgapwidth=0.2
PolygonConnect Polygon_In2.Cu-VAA_ConnectDirect [IsNamedPolygon('In2.Cu-VAA') vs IsVia] p28: connectstyle=Direct reliefconductorwidth=0.254 reliefentries=4 polygonreliefangle="90 Angle" airgapwidth=0.254
PolygonConnect Polygon_In2.Cu-VAA_ConnectRelief45 [IsNamedPolygon('In2.Cu-VAA') vs (IsThruPin or IsSMTPin) and (PadShape_AllLayers = 'Round')] p29: connectstyle=Relief reliefconductorwidth=0.508 reliefentries=4 polygonreliefangle="45 Angle" airgapwidth=0.305
PolygonConnect Polygon_In2.Cu-VAA_ConnectRelief90 [IsNamedPolygon('In2.Cu-VAA') vs (IsThruPin or IsSMTPin) and (PadShape_AllLayers <> 'Round')] p30: connectstyle=Relief reliefconductorwidth=0.508 reliefentries=4 polygonreliefangle="90 Angle" airgapwidth=0.305
PolygonConnect Polygon_In2.Cu-VCC_ConnectDirect [IsNamedPolygon('In2.Cu-VCC') vs IsVia] p31: connectstyle=Direct reliefconductorwidth=0.254 reliefentries=4 polygonreliefangle="90 Angle" airgapwidth=0.254
PolygonConnect Polygon_In2.Cu-VCC_ConnectRelief45 [IsNamedPolygon('In2.Cu-VCC') vs (IsThruPin or IsSMTPin) and (PadShape_AllLayers = 'Round')] p32: connectstyle=Relief reliefconductorwidth=0.508 reliefentries=4 polygonreliefangle="45 Angle" airgapwidth=0.305
PolygonConnect Polygon_In2.Cu-VCC_ConnectRelief90 [IsNamedPolygon('In2.Cu-VCC') vs (IsThruPin or IsSMTPin) and (PadShape_AllLayers <> 'Round')] p33: connectstyle=Relief reliefconductorwidth=0.508 reliefentries=4 polygonreliefangle="90 Angle" airgapwidth=0.305
PolygonConnect Polygon_In3.Cu-GND_ConnectDirect [IsNamedPolygon('In3.Cu-GND') vs IsVia or IsSMTPin] p34: connectstyle=Direct reliefconductorwidth=0.254 reliefentries=4 polygonreliefangle="90 Angle" airgapwidth=0.254
PolygonConnect Polygon_In3.Cu-GND_ConnectRelief45 [IsNamedPolygon('In3.Cu-GND') vs IsThruPin and (PadShape_AllLayers = 'Round')] p35: connectstyle=Relief reliefconductorwidth=0.4 reliefentries=4 polygonreliefangle="45 Angle" airgapwidth=0.2
PolygonConnect Polygon_In3.Cu-GND_ConnectRelief90 [IsNamedPolygon('In3.Cu-GND') vs IsThruPin and (PadShape_AllLayers <> 'Round')] p36: connectstyle=Relief reliefconductorwidth=0.4 reliefentries=4 polygonreliefangle="90 Angle" airgapwidth=0.2
PolygonConnect Polygon_In1.Cu-GND_ConnectDirect [IsNamedPolygon('In1.Cu-GND') vs IsVia or IsSMTPin] p37: connectstyle=Direct reliefconductorwidth=0.254 reliefentries=4 polygonreliefangle="90 Angle" airgapwidth=0.254
PolygonConnect Polygon_In1.Cu-GND_ConnectRelief45 [IsNamedPolygon('In1.Cu-GND') vs IsThruPin and (PadShape_AllLayers = 'Round')] p38: connectstyle=Relief reliefconductorwidth=0.4 reliefentries=4 polygonreliefangle="45 Angle" airgapwidth=0.2
PolygonConnect Polygon_In1.Cu-GND_ConnectRelief90 [IsNamedPolygon('In1.Cu-GND') vs IsThruPin and (PadShape_AllLayers <> 'Round')] p39: connectstyle=Relief reliefconductorwidth=0.4 reliefentries=4 polygonreliefangle="90 Angle" airgapwidth=0.2
PolygonConnect Polygon_B.Cu-GND_ConnectDirect [IsNamedPolygon('B.Cu-GND') vs IsVia or IsSMTPin] p40: connectstyle=Direct reliefconductorwidth=0.254 reliefentries=4 polygonreliefangle="90 Angle" airgapwidth=0.254
PolygonConnect Polygon_B.Cu-GND_ConnectRelief45 [IsNamedPolygon('B.Cu-GND') vs IsThruPin and (PadShape_AllLayers = 'Round')] p41: connectstyle=Relief reliefconductorwidth=0.4 reliefentries=4 polygonreliefangle="45 Angle" airgapwidth=0.2
PolygonConnect Polygon_B.Cu-GND_ConnectRelief90 [IsNamedPolygon('B.Cu-GND') vs IsThruPin and (PadShape_AllLayers <> 'Round')] p42: connectstyle=Relief reliefconductorwidth=0.4 reliefentries=4 polygonreliefangle="90 Angle" airgapwidth=0.2
PolygonConnect Polygon_F.Cu-GND_ConnectDirect [IsNamedPolygon('F.Cu-GND')] p43: connectstyle=Direct reliefconductorwidth=0.254 reliefentries=4 polygonreliefangle="90 Angle" airgapwidth=0.254
PolygonConnect Polygon_F.Cu-/Microcontroller/VBUS_SAFE_ConnectDirect [IsNamedPolygon('F.Cu-/Microcontroller/VBUS_SAFE')] p44: connectstyle=Direct reliefconductorwidth=0.254 reliefentries=4 polygonreliefangle="90 Angle" airgapwidth=0.254
PolygonConnect Polygon_F.Cu-+1V2_ConnectDirect [IsNamedPolygon('F.Cu-+1V2')] p45: connectstyle=Direct reliefconductorwidth=0.254 reliefentries=4 polygonreliefangle="90 Angle" airgapwidth=0.254
PolygonConnect Polygon_F.Cu-Net-(D11-K)_ConnectDirect [IsNamedPolygon('F.Cu-Net-(D11-K)')] p46: connectstyle=Direct reliefconductorwidth=0.254 reliefentries=4 polygonreliefangle="90 Angle" airgapwidth=0.254
PolygonConnect Polygon_F.Cu-VCC-1_ConnectDirect [IsNamedPolygon('F.Cu-VCC-1')] p47: connectstyle=Direct reliefconductorwidth=0.254 reliefentries=4 polygonreliefangle="90 Angle" airgapwidth=0.254
PolygonConnect Polygon_F.Cu-VCC_ConnectDirect [IsNamedPolygon('F.Cu-VCC')] p48: connectstyle=Direct reliefconductorwidth=0.254 reliefentries=4 polygonreliefangle="90 Angle" airgapwidth=0.254
PolygonConnect Polygon_F.Cu-Net-(D13-A)_ConnectDirect [IsNamedPolygon('F.Cu-Net-(D13-A)')] p49: connectstyle=Direct reliefconductorwidth=0.254 reliefentries=4 polygonreliefangle="90 Angle" airgapwidth=0.254
RoutingVias [All] p1: holewidth=0.711 width=1.27 viastyle="Through Hole" minholewidth=0.711 minwidth=1.27 maxholewidth=0.711 maxwidth=1.27
SilkToSilkClearance [All] p1: silktosilkclearance=0
SilkToSolderMaskClearance [IsPad] p1: minsilkscreentomaskgap=0 clearancetoexposedcopper=TRUE
SolderMaskExpansion [All] p1: expansion=0 istentingtop=FALSE
Width [All] p1: maxlimit=10 minlimit=0.254 preferedwidth=0.127 minimp=50.000000 maximp=50.000000 favimp=50.000000
27 further rules are at their usual default settings.

## Classes and differential pairs
pad class "Pad Class Clearance 0.5": FID1-Un1 FID2-Un1 FID3-Un1 FID4-Un1
pad class "Pad Class Clearance 0.04": T1-1 T1-2 T1-3 T1-4 T1-5 T1-6 T2-1 T2-2 T2-3 T2-4 T2-5 T2-6
pad class "Pad Class Clearance 0.05": D1-1 D1-2 D1-Un1 D1-Un2 D3-1 D3-2 D3-Un1 D3-Un2 D9-1 D9-2 D9-Un1 D9-Un2 D10-1 D10-2 D10-Un1 D10-Un2 D11-1 D11-2 D11-Un1 D11-Un2 D13-1 D13-2 D13-Un1 D13-Un2 D14-1 D14-2 D14-Un1 D14-Un2 D15-1 D15-2 D15-Un1 D15-Un2 D16-1 D16-2 D16-Un1 D16-Un2 D17-1 D17-2 D17-Un1 D17-Un2 D18-1 D18-2 D18-Un1 D18-Un2
net class Default: 1V2_EN 1V2FPGA 2V5FPGA 2V5RF 3V3AUX 3V3CLK 3V3FPGA 3V3LED !VAA_ENABLE +1V2 +2V5 +5V AA_BYPASS_I+ AA_BYPASS_I- AA_BYPASS_Q+ AA_BYPASS_Q- AA_EN ADC0_0 ADC0_2 ADC0_3 ADC0_4 ADC0_5 ADC0_6 ADC0_7 AFE_CLK AMP_BYPASS AUX_CLK1 AUX_CLK2 BIAS CAPTURE_EN CC1 CC2 CLK0 CLK1 CLK2 CLK3 CLK4 CLK5 CLK6 CLK7 CLKIN CLKIN_CTRL COM CPLD_TCK CPOUT CS_AD D+ D- DA0 DA1 DA2 DA3 DA4 DA5 DA6 DA7 DBGEN DD0 DD1 DD2 DD3 DD4 DD5 DD6 DD7 DD8 DD9 DIRECTION DISABLE FPGA_CLK FPGA_CONFIG.CDONE FPGA_CONFIG.{\C\R\E\S\E\T\}\ FPGA_CONFIG.{\S\P\I\_\C\S\}\ FPGA_DA0 FPGA_DA1 FPGA_DA2 FPGA_DA3 FPGA_DA4 FPGA_DA5 FPGA_DA6 FPGA_DA7 FPGA_DD0 FPGA_DD1 FPGA_DD2 FPGA_DD3 FPGA_DD4 FPGA_DD5 FPGA_DD6 FPGA_DD7 FPGA_DD8 FPGA_DD9 FPGA_SGPIO0 FPGA_SGPIO1 FPGA_SGPIO2 FPGA_SGPIO3 FPGA_SGPIO4 FPGA_SGPIO5 FPGA_SGPIO6 FPGA_SGPIO7 FPGA_SGPIO8 GND GPIO3_8 GPIO3_9 GPIO3_10 GPIO3_11 GPIO3_12 GPIO3_13 GPIO3_14 GPIO3_15 I2C1_SCL I2C1_SDA I2S0_RX_SDA I2S0_RX_WS I2S0_TX_MCLK I2S0_TX_SCK I2S0_TX_SDA IA+ IA- ID+ ID- IF INTR ISP LPF_EN LPF_OR_MIX_BYPASS MCU_CLK MIX_BYPASS MIX_CLK MIX_EN MIX_IN MIX_IN+ MIX_IN- MIX_OUT MIX_OUT+ MIX_OUT- MIXER.ENBL MIXER.LD MIXER.SCLK MIXER.SDATA MIXER.{\E\N\}\ MIXER.{\R\E\S\E\T\}\ MODE Net-(C13-Pad1) Net-(C15-Pad2) Net-(C45-Pad2) Net-(C50-Pad2) Net-(C54-Pad1) Net-(C56-Pad1) Net-(C67-Pad1) Net-(C78-Pad2) Net-(C101-Pad1) Net-(C101-Pad2) Net-(C103-Pad2) Net-(C112-Pad1) Net-(C112-Pad2) Net-(C115-Pad1) Net-(C139-Pad1) Net-(C139-Pad2) Net-(C188-Pad1) Net-(C191-Pad1) Net-(C191-Pad2) Net-(C192-Pad2) Net-(C195-Pad1) Net-(C195-Pad2) Net-(C198-Pad2) Net-(C202-Pad1) Net-(C202-Pad2) Net-(C203-Pad1) Net-(C203-Pad2) Net-(C207-Pad1) Net-(C207-Pad2) Net-(C210-Pad1) Net-(C210-Pad2) Net-(C211-Pad2) Net-(D1-A1) Net-(D2-A) Net-(D4-A1) Net-(D4-A2) Net-(D5-A) Net-(D6-A2) Net-(D7-A1) Net-(D7-A2) Net-(D8-A1) Net-(D10-A) Net-(D11-K) Net-(D13-A) Net-(D14-K) Net-(D15-K) Net-(D16-A) Net-(D16-K) Net-(D17-A) Net-(D17-K) Net-(FL2-IN) Net-(FL3-IN) Net-(JP1-A) Net-(L6-Pad1) Net-(L21-Pad1) Net-(L22-Pad1) Net-(L23-Pad1) Net-(L24-Pad1) Net-(Q1B-D) Net-(Q3-D) Net-(Q3-G) Net-(Q4-G) Net-(Q5-G) Net-(Q6-D) Net-(Q6-G) Net-(Q7A-B1) Net-(Q7A-C1) Net-(Q9A-B1) Net-(Q9B-B2) Net-(Q10A-B1) Net-(Q10A-C1) Net-(Q10B-B2) Net-(Q10B-C2) Net-(R19-Pad2) Net-(R24-Pad2) Net-(R30-Pad2) Net-(R94-Pad2) Net-(R96-Pad2) Net-(R98-Pad2) Net-(R108-Pad2) Net-(T1-S1) Net-(T1-S2) Net-(T2-S1) Net-(T2-S2) Net-(U1-RF3) Net-(U1-RF4) Net-(U3-D1+) Net-(U3-D1-) Net-(U4-LFILT1) Net-(U4-LFILT2) Net-(U4-LFILT3) Net-(U4-MODE{slash}GPO6) Net-(U4-REXT) Net-(U5-RF1) Net-(U8-D2+) Net-(U8-D2-) Net-(U9-RF1) Net-(U9-RF3) Net-(U14-ANT) Net-(U16B-IOB_32a_SPI_SO) Net-(U17-BYPASS) Net-(U18-REFIN) Net-(U21-ADJ2) Net-(U21-DEF_1) Net-(U21-EN1) Net-(U21-SW1) Net-(U21-SW2) Net-(U23-P1_4) Net-(U23-P1_19) Net-(U23-P2_6) Net-(U23-P4_3) Net-(U23-P4_6) Net-(U23-PD_12) Net-(U24-ILIM) Net-(U25-RFIN) Net-(U25-RFOUT) Net-(U28-ILIM) Net-(U30-Pad4) Net-(U33-A) Net-(U34-D2+) Net-(U34-D2-) Net-(U35-D1+) Net-(U35-D1-) Net-(U38-ADJ) Net-(U38-BIAS) Net-(U38-RFIN) Net-(U38-RFOUT) Net-(U40-ADJ) Net-(U40-BIAS) Net-(U40-RFIN) Net-(U40-RFOUT) Net-(X1-OUT) OEB P1 P1_1 P1_2 P1_7 P1_CLKIN P1_CTRL0 P1_CTRL1 P1_CTRL2 P2 P2_5 P2_8 P2_9 P2_13 P2_CTRL0 P2_CTRL1 P5_3 P5_6 P5_7 P9_1 P22_CLKIN PA_3 PA_4 PB_0 PB_1 PB_3 PB_5 PE_0 Q_INVERT QA+ QA- QD+ QD- REF_IN REFN REFP RF RF_AMP_EN RREF RTCX1 RTCX2 RX_AMP_EN RX_AMP_IN RX_AMP_OUT RX_EN RX_MIX_IN RX_MIX_OUT RX_XOR_LPF RX_XOR_MIX RXBB.I+ RXBB.I- RXBB.Q+ RXBB.Q- RXIF RXIF+ RXIF- RXIF_BALUN+ RXIF_BALUN- SCL SCT_CLK SD_CD SD_CLK SD_CMD SD_DAT0 SD_DAT1 SD_DAT2 SD_DAT3 SD_POW SD_VOLT0 SDA SGPIO0 SGPIO1 SGPIO2 SGPIO3 SGPIO4 SGPIO5 SGPIO6 SGPIO7 SGPIO8 SGPIO9 SGPIO10 SGPIO11 SGPIO12 SPIFI_CIPO SPIFI_COPI SPIFI_SCK SPIFI_SIO2 SPIFI_SIO3 SPIFI_{\C\S\}\ SSP1_CIPO SSP1_COPI SSP1_SCK TCK TDI TDO TMS TRIGGER.IN TRIGGER.OUT TUNE TX_AMP_IN TX_AMP_OUT TX_EN TX_MIX_EN TX_MIX_IN TX_MIX_OUT TXBB.I+ TXBB.I- TXBB.Q+ TXBB.Q- TXIF TXIF+ TXIF- TXIF_BALUN+ TXIF_BALUN- U0_RXD U0_TXD unconnected-(D6-A1-Pad1) unconnected-(D6-K1-Pad2) unconnected-(D8-A2-Pad3) unconnected-(D8-K2-Pad4) unconnected-(J1-SBU1-PadA8) unconnected-(J1-SBU2-PadB8) unconnected-(P26-Pin_7-Pad7) unconnected-(Q7B-B2-Pad5) unconnected-(Q7B-C2-Pad3) unconnected-(Q7B-E2-Pad4) unconnected-(RN2-R1.1-Pad1) unconnected-(RN2-R1.2-Pad8) unconnected-(RN3-R1.1-Pad1) unconnected-(RN3-R1.2-Pad8) unconnected-(U1-N{slash}C-Pad2) unconnected-(U1-N{slash}C-Pad8) unconnected-(U2-N{slash}C-Pad2) unconnected-(U2-N{slash}C-Pad8) unconnected-(U4-EXT_LO-Pad2) unconnected-(U4-EXT_LO_DEC-Pad3) unconnected-(U4-GPO1{slash}ADD1-Pad15) unconnected-(U4-GPO2{slash}ADD2-Pad16) unconnected-(U4-GPO3{slash}FM-Pad25) unconnected-(U4-NC-Pad11) unconnected-(U4-NC-Pad13) unconnected-(U4-NC-Pad14) unconnected-(U4-NC-Pad17) unconnected-(U4-NC-Pad18) unconnected-(U4-NC-Pad20) unconnected-(U4-NC-Pad21) unconnected-(U17-B1-Pad23) unconnected-(U17-B2-Pad11) unconnected-(U17-B3-Pad8) unconnected-(U17-B4-Pad34) unconnected-(U17-B5-Pad14) unconnected-(U17-B6-Pad3) unconnected-(U17-B7-Pad6) unconnected-(U17-CLOCKOUT-Pad21) unconnected-(U17-CTUNE-Pad29) unconnected-(U18-NC-Pad38) unconnected-(U19-XB-Pad2) unconnected-(U23-NC-PadB8) unconnected-(U23-P4_0-PadD4) unconnected-(U23-P4_8-PadD2) unconnected-(U23-P5_0-PadL2) unconnected-(U23-P6_0-PadM10) unconnected-(U23-P6_10-PadG13) unconnected-(U23-P8_3-PadH3) unconnected-(U23-P8_8-PadK1) unconnected-(U23-PA_0-PadL10) unconnected-(U23-PB_2-PadB11) unconnected-(U23-PB_4-PadB10) unconnected-(U23-RTC_ALARM-PadA10) unconnected-(U23-USB0_ID-PadG2) unconnected-(U23-USB1_DM-PadE11) unconnected-(U23-USB1_DP-PadD11) unconnected-(U23-WAKEUP1-PadC8) unconnected-(U23-WAKEUP2-PadE5) unconnected-(U33-A6-Pad2) unconnected-(X1-NC-Pad1) USB0_VBUS USB_DATA.D+ USB_DATA.D- VAA VBAT VBUS VBUS_SAFE VBUSCTRL VCC VCCPLL VIN WAKEUP XA XCVR.LD XCVR.RSSI XCVR.RXHP XCVR.RXTX XCVR.{\C\S\}\ XCVR.{\S\H\D\N\}\ XCVR_CLK XTAL XTAL1 XTAL2 {\3\V\3\A\U\X\_\E\N\}\ {\3\V\3\A\U\X\_\O\C\}\ {\A\A\_\E\N\}\ {\B\B\_\E\N\}\ {\B\I\A\S\_\E\N\}\ {\B\I\A\S\_\O\C\}\ {\L\E\D\1\}\ {\L\E\D\2\}\ {\L\E\D\3\}\ {\L\E\D\4\}\ {\M\I\X\_\E\N\}\ {\R\E\S\E\T\}\ {\R\X\_\A\M\P\_\E\N\}\ {\T\R\S\T\}\ {\T\X\_\A\M\P\_\E\N\}\ {\V\B\U\S\_\I\N\_\E\N\}\ {\V\I\N\_\I\N\_\E\N\}\

## Components (designator, comment, footprint, x,y, rotation, side; value= is the part's Value field where it differs from the comment)
C1 "Comment" C_0201_0603Metric 83.4,49.82 r270 top value="1 uF"
C2 "Comment" C_0201_0603Metric 73.95,27.02 r90 top value="1 uF"
C3 "Comment" C_0201_0603Metric 84.6,49.82 r270 top value="1 uF"
C4 "Comment" C_0201_0603Metric 78.35,40.77 r180 top value="3.3 nF"
C5 "Comment" C_0201_0603Metric 84.2,57.42 r90 top value="1 uF"
C6 "Comment" C_0201_0603Metric 83.35,27.52 r90 top value="3.3 nF"
C7 "Comment" C_0201_0603Metric 94.65,54.02 r90 top value="1 uF"
C8 "Comment" C_0201_0603Metric 89.75,46.47 r0 top value="1 uF"
C9 "Comment" C_0201_0603Metric 86.85,46.47 r0 top value="3.3 nF"
C10 "Comment" C_0201_0603Metric 89.8,43.02 r0 top value="1 uF"
C11 "Comment" C_0201_0603Metric 89.8,44.12 r180 top value="3.3 nF"
C12 "Comment" C_0201_0603Metric 81.7,57.12 r180 top value="330 pF"
C13 "Comment" C_0201_0603Metric 80.6,58.22 r90 top value="330 pF"
C14 "Comment" C_0201_0603Metric 83.1,57.12 r0 top value="8.2 pF"
C15 "Comment" C_0201_0603Metric 82.8,58.22 r90 top value="180 pF"
C16 "Comment" C_0201_0603Metric 94.65,51.22 r90 top value="3.3 nF"
C17 "Comment" C_0201_0603Metric 93.7,44.37 r270 top value="1 uF"
C18 "Comment" C_0201_0603Metric 95.8,31.02 r90 top value="3.3 nF"
C19 "Comment" C_0201_0603Metric 88.4,35.02 r180 top value="3.3 nF"
C20 "Comment" C_0201_0603Metric 95.9,44.37 r90 top value="3.3 nF"
C21 "Comment" C_0201_0603Metric 94.8,31.02 r270 top value="1 uF"
C22 "Comment" C_0402_1005Metric 71.3,43.92 r0 top value="1 uF"
C23 "Comment" C_0402_1005Metric 73.9,46.12 r270 top value="1 uF"
C24 "Comment" C_0201_0603Metric 113.85,30.77 r0 top value="1 uF"
C25 "Comment" C_0201_0603Metric 87.7,48.62 r0 top value="1 uF"
C26 "Comment" C_0201_0603Metric 85.3,27.72 r90 top value="1 uF"
C27 "Comment" C_0201_0603Metric 93.3,27.72 r90 top value="1 uF"
C28 "Comment" C_0201_0603Metric 87.7,47.72 r0 top value="1 uF"
C29 "Comment" C_0201_0603Metric 88.4,36.07 r180 top value="3.3 nF"
C30 "Comment" C_0201_0603Metric 89.3,27.72 r90 top value="1 uF"
C31 "Comment" C_0201_0603Metric 88.4,33.97 r0 top value="1 uF"
C32 "Comment" C_0402_1005Metric 163.1,27.12 r0 top value="1 uF"
C33 "Comment" C_0402_1005Metric 158.1,26.42 r270 top value="1 uF"
C34 "Comment" C_0201_0603Metric 89.7,57.82 r90 top value="33 pF"
C35 "Comment" C_0201_0603Metric 88.8,57.82 r90 top value="33 pF"
C36 "Comment" C_0201_0603Metric 87.9,57.82 r90 top value="33 pF"
C37 "Comment" C_0201_0603Metric 87,57.42 r90 top value="33 pF"
C39 "Comment" C_0402_1005Metric 132.9,27.67 r0 top value="1 uF"
C40 "Comment" C_0402_1005Metric 135.1,37.02 r270 top value="1 uF"
C41 "Comment" C_0201_0603Metric 90.15,48.97 r180 top value="1 uF"
C42 "Comment" C_0201_0603Metric 91.45,57.32 r90 top value="1 uF"
C43 "Comment" C_0402_1005Metric 135.1,35.02 r90 top value="1 uF"
C44 "Comment" C_0201_0603Metric 106.45,30.17 r90 top value="100 pF"
C45 "Comment" C_0201_0603Metric 108.2,29.82 r180 top value="2.2 nF"
C46 "Comment" C_0201_0603Metric 93.65,52.97 r90 top value="1 uF"
C47 "Comment" C_0201_0603Metric 109.15,36.02 r180 top value="68 pF"
C48 "Comment" C_0201_0603Metric 109.15,33.17 r0 top value="1 uF"
C49 "Comment" C_0201_0603Metric 92.35,54.42 r180 top value="1 uF"
C50 "Comment" C_0201_0603Metric 83.1,32.57 r0 top value="1 uF"
C51 "Comment" C_0201_0603Metric 89.2,41.02 r90 top value="0.7 pF"
C52 "Comment" C_0201_0603Metric 79.35,31.97 r0 top value="1 uF"
C53 "Comment" C_0201_0603Metric 77.25,27.32 r180 top value="1 uF"
C54 "Comment" C_0201_0603Metric 90.95,39.97 r0 top value="1.8 pF"
C55 "Comment" C_0201_0603Metric 81.25,33.77 r0 top value="3.3 nF"
C56 "Comment" C_0201_0603Metric 89.9,38.22 r270 top value="1.8 pF"
C57 "Comment" C_0201_0603Metric 81.25,34.82 r0 top value="3.3 nF"
C58 "Comment" C_0201_0603Metric 76.45,32.92 r0 top value="1 uF"
C59 "Comment" C_0201_0603Metric 81.7,37.82 r180 top value="1 uF"
C60 "Comment" C_0201_0603Metric 81.25,35.87 r180 top value="1 uF"
C61 "Comment" C_0201_0603Metric 87.8,38.92 r90 top value="0.7 pF"
C62 "Comment" C_0201_0603Metric 75.6,37.82 r270 top value="1 uF"
C63 "Comment" C_0201_0603Metric 77.45,35.02 r180 top value="3.3 nF"
C64 "Comment" C_0402_1005Metric 71.45,34.92 r180 top value="1 uF"
C65 "Comment" C_0201_0603Metric 77.45,36.07 r180 top value="3.3 nF"
C66 "Comment" C_0201_0603Metric 77.45,33.97 r0 top value="1 uF"
C67 "Comment" C_0201_0603Metric 80.7,53.67 r90 top value="33 pF"
C68 "Comment" C_0201_0603Metric 74.65,34.92 r180 top value="1 uF"
C69 "Comment" C_0201_0603Metric 73.65,33.57 r270 top value="1 uF"
C70 "Comment" C_0201_0603Metric 81.05,55.07 r90 top value="100 pF"
C71 "Comment" C_0201_0603Metric 105,50.82 r180 top value="1 uF"
C72 "Comment" C_0201_0603Metric 115.4,37.32 r0 top value="1 uF"
C73 "Comment" C_0201_0603Metric 108.1,50.82 r180 top value="1 uF"
C74 "Comment" C_0201_0603Metric 109.8,46.82 r180 top value="180 pF"
C75 "Comment" C_0201_0603Metric 110.1,50.82 r0 top value="1 uF"
C76 "Comment" C_0201_0603Metric 109.8,42.32 r180 top value="180 pF"
C77 "Comment" C_0201_0603Metric 106.4,59.82 r0 top value="1 uF"
C78 "Comment" C_0201_0603Metric 80.6,29.67 r180 top value="1 uF"
C79 "Comment" C_0201_0603Metric 102.9,57.52 r90 top value="1 uF"
C80 "Comment" C_0402_1005Metric 66.4,77.92 r270 top value="1 uF"
C81 "Comment" C_0402_1005Metric 63.3,59.02 r180 top value="1 uF"
C82 "Comment" C_0201_0603Metric 102.9,55.37 r90 top value="1 uF"
C83 "Comment" C_0201_0603Metric 102.6,53.72 r180 top value="1 uF"
C84 "Comment" C_0201_0603Metric 99.8,37.52 r270 top value="1 uF"
C85 "Comment" C_0201_0603Metric 99.45,34.92 r180 top value="1 uF"
C86 "Comment" C_0201_0603Metric 101.55,30.17 r270 top value="1 uF"
C87 "Comment" C_0201_0603Metric 103.55,30.17 r270 top value="1 uF"
C88 "Comment" C_0201_0603Metric 105.05,30.17 r270 top value="1 uF"
C89 "Comment" C_0201_0603Metric 108.8,32.12 r90 top value="1 uF"
C90 "Comment" C_0201_0603Metric 108.8,34.87 r90 top value="1 uF"
C91 "Comment" C_0201_0603Metric 85.35,41.72 r180 top value="1.6 pF"
C92 "Comment" C_0201_0603Metric 105.95,39.87 r90 top value="1 uF"
C93 "Comment" C_0201_0603Metric 105.15,39.87 r90 top value="1 uF"
C94 "Comment" C_0201_0603Metric 102.15,39.52 r180 top value="1 uF"
C95 "Comment" C_0201_0603Metric 75.15,30.42 r180 top value="1 uF"
C96 "Comment" C_0201_0603Metric 86.05,39.62 r0 top value="1.6 pF"
C97 "Comment" C_0201_0603Metric 102.6,52.21 r180 top value="1 uF"
C98 "Comment" C_0201_0603Metric 102.9,51.12 r270 top value="1 uF"
C99 "Comment" C_0201_0603Metric 99.45,36.32 r180 top value="22 pF"
C100 "Comment" C_0201_0603Metric 103.9,50.52 r270 top value="1 uF"
C101 "Comment" C_0201_0603Metric 83.6,41.37 r270 top value="0.7 pF"
C102 "Comment" C_0201_0603Metric 99.45,35.62 r180 top value="22 pF"
C103 "Comment" C_0201_0603Metric 83.95,39.62 r0 top value="0.7 pF"
C104 "Comment" C_0201_0603Metric 99.45,33.82 r180 top value="4.3 pF"
C105 "Comment" C_0805_2012Metric 84,67.12 r0 top value="10 uF"
C106 "Comment" C_0201_0603Metric 109.15,36.72 r0 top value="1 uF"
C107 "Comment" C_0201_0603Metric 115.4,42.32 r180 top value="180 pF"
C108 "Comment" C_0201_0603Metric 115.4,46.82 r180 top value="180 pF"
C109 "Comment" C_0201_0603Metric 86.1,57.42 r90 top value="33 pF"
C110 "Comment" C_0402_1005Metric 63.3,54.52 r180 top value="1 uF"
C111 "Comment" C_0201_0603Metric 99.45,33.12 r180 top value="4.3 pF"
C112 "Comment" C_0201_0603Metric 71,32.92 r180 top value="100 pF"
C113 "Comment" C_0402_1005Metric 122.6,30.12 r270 top value="1 uF"
C114 "Comment" C_0201_0603Metric 90.35,53.12 r90 top value="0.3 pF"
C115 "Comment" C_0201_0603Metric 111,34.07 r180 top value="22 pF"
C116 "Comment" C_0201_0603Metric 111,34.77 r0 top value="47 pF"
C117 "Comment" C_0805_2012Metric 134.2,69.92 r270 top value="10 uF"
C118 "Comment" C_0402_1005Metric 164.2,44.62 r270 top value="18 pF"
C119 "Comment" C_0402_1005Metric 127.4,35.32 r0 top value="1 uF"
C120 "Comment" C_0402_1005Metric 128.8,33.82 r90 top value="1 uF"
C121 "Comment" C_0402_1005Metric 122.15,31.97 r180 top value="1 uF"
C122 "Comment" C_0402_1005Metric 124.6,35.32 r180 top value="1 uF"
C123 "Comment" C_0201_0603Metric 111.9,54.82 r270 top value="1 uF"
C124 "Comment" C_0402_1005Metric 63.3,49.92 r180 top value="1 uF"
C125 "Comment" C_0201_0603Metric 162.4,82.92 r0 top value="33 pF"
C126 "Comment" C_0805_2012Metric 163.2,85.72 r270 top value="10 uF"
C127 "Comment" C_0805_2012Metric 161.2,85.72 r270 top value="10 uF"
C128 "Comment" C_0402_1005Metric 145.6,53.32 r0 top value="1 uF"
C129 "Comment" C_0402_1005Metric 144.5,48.02 r90 top value="1 uF"
C130 "Comment" C_0402_1005Metric 144.5,43.12 r90 top value="1 uF"
C131 "Comment" C_0402_1005Metric 159.5,47.62 r90 top value="1 uF"
C132 "Comment" C_0402_1005Metric 159.5,51.32 r90 top value="1 uF"
C133 "Comment" C_0402_1005Metric 151.7,53.32 r0 top value="1 uF"
C134 "Comment" C_0402_1005Metric 145.9,38.32 r0 top value="1 uF"
C135 "Comment" C_0402_1005Metric 151.8,38.32 r0 top value="1 uF"
C136 "Comment" C_0402_1005Metric 160.4,45.02 r0 top value="1 uF"
C137 "Comment" C_0402_1005Metric 158.1,38.32 r0 top value="1 uF"
C138 "Comment" C_0402_1005Metric 159.5,42.82 r90 top value="1 uF"
C139 "Comment" C_0201_0603Metric 73.9,40.62 r90 top value="1 uF"
C140 "Comment" C_0402_1005Metric 102,64.62 r0 top value="1 uF"
C141 "Comment" C_0201_0603Metric 113.3,48.72 r0 top value="1 uF"
C142 "Comment" C_0201_0603Metric 111.75,41.97 r90 top value="1 uF"
C143 "Comment" C_0805_2012Metric 165.7,80.52 r180 top value="22 uF"
C144 "Comment" C_0402_1005Metric 161.1,35.52 r0 top value="1 uF"
C145 "Comment" C_0805_2012Metric 169.8,85.72 r90 top value="10 uF"
C146 "Comment" C_0805_2012Metric 171.8,85.72 r90 top value="10 uF"
C147 "Comment" C_0805_2012Metric 165.7,82.52 r180 top value="22 uF"
C148 "Comment" C_0201_0603Metric 133.92,67.25 r90 top value="1 uF"
C149 "Comment" C_0201_0603Metric 140.23,64.27 r0 top value="1 uF"
C150 "Comment" C_0201_0603Metric 132.11,57.94 r180 top value="1 uF"
C151 "Comment" C_0201_0603Metric 164,59.97 r180 top value="330 pF"
C152 "Comment" C_0201_0603Metric 165.4,59.97 r0 top value="330 pF"
C153 "Comment" C_0402_1005Metric 80.6,68.17 r0 top value="100 nF"
C154 "Comment" C_0805_2012Metric 84,65.12 r0 top value="10 uF"
C155 "Comment" C_0402_1005Metric 124,29.12 r180 top value="100 nF"
C156 "Comment" C_0201_0603Metric 107.7,48.72 r0 top value="1 uF"
C157 "Comment" C_0402_1005Metric 159.7,54.52 r270 top value="18 pF"
C158 "Comment" C_0402_1005Metric 154.5,54.52 r90 top value="18 pF"
C159 "Comment" C_0201_0603Metric 106.15,41.97 r90 top value="1 uF"
C160 "Comment" C_0201_0603Metric 76.3,42.02 r90 top value="1 uF"
C161 "Comment" C_0201_0603Metric 79.55,37.57 r180 top value="1 uF"
C162 "Comment" C_0402_1005Metric 63.3,63.72 r180 top value="1 uF"
C163 "Comment" C_0805_2012Metric 76.1,65.92 r270 top value="10 uF"
C164 "Comment" C_0402_1005Metric 164.2,46.82 r90 top value="18 pF"
C165 "Comment" C_0805_2012Metric 147.6,60.12 r0 top value="10 uF"
C166 "Comment" C_0805_2012Metric 128.7,45.12 r90 top value="10 uF"
C167 "Comment" C_0805_2012Metric 128.7,40.12 r270 top value="10 uF"
C168 "Comment" C_0402_1005Metric 121,29.12 r0 top value="1 uF"
C169 "Comment" C_0805_2012Metric 98.5,65.52 r0 top value="10 uF"
C170 "Comment" C_0805_2012Metric 93.5,65.52 r180 top value="10 uF"
C171 "Comment" C_0402_1005Metric 69.5,26.62 r270 top value="1 uF"
C172 "Comment" C_0805_2012Metric 152.1,70.52 r0 top value="10 uF"
C173 "Comment" C_0402_1005Metric 139.5,70.82 r270 top value="1 uF"
C174 "Comment" C_0201_0603Metric 130.1,60.52 r270 top value="1 uF"
C175 "Comment" C_0805_2012Metric 141.7,67.22 r180 top value="10 uF"
C176 "Comment" C_0201_0603Metric 136.4,67.25 r90 top value="1 uF"
C177 "Comment" C_0201_0603Metric 139.9,65.42 r90 top value="1 uF"
C178 "Comment" C_0201_0603Metric 135.49,67.25 r90 top value="1 uF"
C179 "Comment" C_0201_0603Metric 134.71,57.59 r270 top value="1 uF"
C180 "Comment" C_0402_1005Metric 150.3,63.12 r90 top value="100 nF"
C181 "Comment" C_0805_2012Metric 145.6,67.72 r180 top value="10 uF"
C182 "Comment" C_0805_2012Metric 145.6,65.72 r180 top value="10 uF"
C183 "Comment" C_0201_0603Metric 141.1,59.52 r270 top value="1 uF"
C184 "Comment" C_0805_2012Metric 147.1,70.52 r180 top value="10 uF"
C185 "Comment" C_0201_0603Metric 129.7,66.27 r180 top value="1 uF"
C186 "Comment" C_0805_2012Metric 116.4,54.22 r270 top value="10 uF"
C187 "Comment" C_0201_0603Metric 111.3,60.82 r180 top value="1 uF"
C188 "Comment" C_0201_0603Metric 75.8,48.92 r180 top value="0.3 pF"
C189 "Comment" C_0201_0603Metric 82.1,44.12 r180 top value="1 uF"
C190 "Comment" C_0201_0603Metric 73.05,52.77 r90 top value="1 uF"
C191 "Comment" C_0201_0603Metric 74.4,49.62 r180 top value="1 uF"
C192 "Comment" C_0201_0603Metric 75.45,51.37 r90 top value="1 uF"
C193 "Comment" C_0201_0603Metric 77.75,52.47 r270 top value="1 uF"
C194 "Comment" C_0201_0603Metric 77.9,53.82 r0 top value="1 uF"
C195 "Comment" C_0201_0603Metric 76.85,55.57 r90 top value="1 uF"
C196 "Comment" C_0201_0603Metric 139.3,67.07 r0 top value="1 uF"
C197 "Comment" C_0805_2012Metric 128.3,61.42 r90 top value="10 uF"
C198 "Comment" C_0201_0603Metric 88.25,52.42 r270 top value="0.7 pF"
C199 "Comment" C_0402_1005Metric 127.2,28.62 r90 top value="1 uF"
C200 "Comment" C_0805_2012Metric 71.6,38.62 r180 top value="10 uF"
C201 "Comment" C_0805_2012Metric 97.9,41.32 r90 top value="10 uF"
C202 "Comment" C_0201_0603Metric 90.2,54.87 r180 top value="1 uF"
C203 "Comment" C_0201_0603Metric 90.2,51.37 r0 top value="1 uF"
C204 "Comment" C_0805_2012Metric 96.9,58.82 r0 top value="10 uF"
C205 "Comment" C_0201_0603Metric 139.55,57.92 r0 top value="1 uF"
C206 "Comment" C_0201_0603Metric 80.8,26.17 r0 top value="1 uF"
C207 "Comment" C_0201_0603Metric 84.8,31.77 r0 top value="1 uF"
C208 "Comment" C_0201_0603Metric 86.45,30.27 r270 top value="1 uF"
C209 "Comment" C_0201_0603Metric 83.6,33.37 r0 top value="0.3 pF"
C210 "Comment" C_0201_0603Metric 78.65,28.72 r0 top value="1 uF"
C211 "Comment" C_0201_0603Metric 75.45,56.97 r270 top value="1 uF"
C212 "Comment" C_0201_0603Metric 97.7,27.07 r270 top value="1 uF"
D1 "Comment" TSSLP-2-1 66.5,34.62 r270 top value=TVS
D2 "Comment" LED_Single_Xinglight_XL-3210_Horizontal 61.27,60.698 r90 top value=LED
D3 "Comment" TSLP-2-19 172.9,30.62 r270 top value=TVS
D4 "Comment" LED_Dual_Xinglight_XL-3210_Horizontal 61.27,56.126 r90 top value=LED
D5 "Comment" LED_Single_Xinglight_XL-3210_Horizontal 61.27,51.554 r90 top value=LED
D6 "Comment" LED_Dual_Xinglight_XL-3210_Horizontal 61.27,46.982 r90 top value=LED
D7 "Comment" LED_Dual_Xinglight_XL-3210_Horizontal 61.27,77.92 r90 top value=LED
D8 "Comment" LED_Dual_Xinglight_XL-3210_Horizontal 61.27,65.27 r90 top value=LED
D9 "Comment" TSLP-2-19 175.5,44.32 r0 top value=TVS
D10 "Comment" TSLP-2-19 69.5,28.22 r270 top value=Schottky
D11 "Comment" TSLP-2-19 168.55,77.42 r0 top value="6.2 V"
D12 "Comment" D_SOD-123FL 169.7,79.22 r0 top value=D
D13 "Comment" TSLP-2-19 164.6,78.82 r180 top value=0
D14 "Comment" TSLP-2-19 72.85,34.57 r270 top value=PIN
D15 "Comment" TSSLP-2-1 73.65,34.72 r90 top value=Schottky
D16 "Comment" TSLP-2-19 177.8,82.02 r180 top value="5.6 V"
D17 "Comment" TSLP-2-19 160.6,76.62 r0 top value="5.6 V"
D18 "Comment" TSLP-2-19 170.5,75.02 r90 top value=TVS
FB1 "Comment" L_0603_1608Metric 168.2,81.92 r270 top value=Ferrite
FB2 "Comment" L_0603_1608Metric 128.7,42.62 r0 top value=Ferrite
FB3 "Comment" L_0603_1608Metric 81.5,66.12 r90 top value=Ferrite
FB4 "Comment" L_0603_1608Metric 148.2,66.22 r90 top value=Ferrite
FB5 "Comment" L_0603_1608Metric 96,65.52 r270 top value=Ferrite
FB6 "Comment" L_0603_1608Metric 136,69.47 r90 top value=Ferrite
FB7 "Comment" L_0603_1608Metric 149.6,70.52 r270 top value=Ferrite
FB8 "Comment" L_0603_1608Metric 141.8,65.42 r180 top value=Ferrite
FID1 "Comment" Fiducial_1mm_Mask2mm 68.5,89.82 r0 top value=Fiducial_1mm_Mask2mm
FID2 "Comment" Fiducial_1mm_Mask2mm 68,22.82 r0 top value=Fiducial_1mm_Mask2mm
FID3 "Comment" Fiducial_1mm_Mask2mm 172,27.82 r0 top value=Fiducial_1mm_Mask2mm
FID4 "Comment" Fiducial_1mm_Mask2mm 171,93.82 r0 top value=Fiducial_1mm_Mask2mm
FL1 "Comment" L_CommonModeChoke_Murata_DLM0NS 167.6,71.82 r0 top value=CommonModeChoke
FL2 "Comment" Filter_Pulse_BPF1608LM09R5000A 91.9,32.57 r180 top value=BPF
FL3 "Comment" Filter_Pulse_BPF1608LM09R5000A 94.8,37.22 r90 top value=BPF
H1 "Comment" MountingHole_3.2mm_M3_Pad_Via 64,91.82 r0 top value=MountingHole_Pad
H2 "Comment" MountingHole_3.2mm_M3_Pad_Via 64,24.82 r0 top value=MountingHole_Pad
H3 "Comment" MountingHole_3.2mm_M3_Pad_Via 176,24.82 r0 top value=MountingHole_Pad
H4 "Comment" MountingHole_3.2mm_M3_Pad_Via 176,91.82 r0 top value=MountingHole_Pad
H5 "Comment" MountingHole_2.2mm_M2_Pad_Via 64,42.32 r0 top value=MountingHole_Pad
H6 "Comment" MountingHole_2.2mm_M2_Pad_Via 169,23.82 r0 top value=MountingHole_Pad
H7 "Comment" MountingHole_2.2mm_M2_Pad_Via 177.5,63.82 r0 top value=MountingHole_Pad
H8 "Comment" MountingHole_2.2mm_M2_Pad_Via 71,68.82 r0 top value=MountingHole_Pad
J1 "Comment" USB_C_Receptacle_HRO_TYPE-C-31-M-12 177.35,71.82 r90 top value=USB_C
J3 "Comment" Laird_Technologies_BMI-S-230-F_50.8x38.1mm 93,43.82 r0 top value=RF_SHIELD_FRAME
JP1 "Comment" SolderJumper-2_P1.3mm_Bridged_RoundedPad1.0x1.5mm 143.45,24.32 r180 top value=SolderJumper_2_Bridged
L1 "Comment" L_0201_0603Metric 86,50.12 r0 top value=DNP
L2 "Comment" L_TDK_MLZ2012_h1.25mm 89.55,56.07 r180 top value="100 uH"
L3 "Comment" L_0201_0603Metric 88.95,53.82 r270 top value="56 nH"
L4 "Comment" L_TDK_MLZ2012_h1.25mm 77.1,29.22 r90 top value="100 uH"
L5 "Comment" L_TDK_MLZ2012_h1.25mm 84.55,30.57 r180 top value="100 uH"
L6 "Comment" L_0201_0603Metric 88.25,53.82 r270 top value="5.6 nH"
L7 "Comment" L_0201_0603Metric 98.4,35.97 r90 top value=DNP
L8 "Comment" L_0201_0603Metric 90.25,40.67 r180 top value="4.7 nH"
L9 "Comment" L_0201_0603Metric 98.4,33.47 r90 top value="10 nH"
L10 "Comment" L_Taiyo-Yuden_NR-40xx 163.1,90.12 r180 top value="4.7 uH"
L11 "Comment" L_Taiyo-Yuden_NR-40xx 170,90.12 r180 top value="4.7 uH"
L12 "Comment" L_0201_0603Metric 77,39.22 r270 top value="56 nH"
L13 "Comment" L_0603_1608Metric 69.45,34.07 r90 top value="2.2 uH"
L14 "Comment" L_0201_0603Metric 90.6,38.92 r90 top value="5.6 nH"
L15 "Comment" L_0201_0603Metric 88.85,38.57 r0 top value="4.7 nH"
L16 "Comment" L_0201_0603Metric 84.3,42.07 r90 top value="1.8 nH"
L17 "Comment" L_0201_0603Metric 85,39.27 r270 top value="1.8 nH"
L18 "Comment" L_0201_0603Metric 83.25,40.32 r180 top value="1.6 nH"
L19 "Comment" L_Taiyo-Yuden_A251818 69.9,30.92 r90 top value="47 uH"
L21 "Comment" L_TDK_MLZ2012_h1.25mm 116.25,44.22 r270 top value="100 uH"
L22 "Comment" L_TDK_MLZ2012_h1.25mm 114.55,44.22 r270 top value="100 uH"
L23 "Comment" L_TDK_MLZ2012_h1.25mm 110.65,44.22 r270 top value="100 uH"
L24 "Comment" L_TDK_MLZ2012_h1.25mm 108.95,44.22 r270 top value="100 uH"
L26 "Comment" L_TDK_MLZ2012_h1.25mm 75.1,41.17 r270 top value="100 uH"
L27 "Comment" L_TDK_MLZ2012_h1.25mm 74.25,51.52 r270 top value="100 uH"
L28 "Comment" L_0201_0603Metric 75.8,50.32 r0 top value="18 nH"
L29 "Comment" L_TDK_MLZ2012_h1.25mm 89.55,50.17 r180 top value="100 uH"
L30 "Comment" L_0201_0603Metric 88.95,52.42 r90 top value="56 nH"
L31 "Comment" L_0201_0603Metric 77.25,31.82 r0 top value="56 nH"
L32 "Comment" L_0201_0603Metric 82.3,30.37 r180 top value="56 nH"
L33 "Comment" L_TDK_MLZ2012_h1.25mm 78.05,55.72 r90 top value="100 uH"
L34 "Comment" L_0201_0603Metric 75.8,53.82 r180 top value="33 nH"
P1 "Comment" SMA_MyAntenna_A-SMA-KE-16.5A_EdgeMount 178.5,32.82 r180 top value=SMA
P2 "Comment" SMA_MyAntenna_A-SMA-KE-16.5A_EdgeMount 178.5,50.82 r180 top value=SMA
P3 "Comment" SMA_MyAntenna_A-SMA-KE-16.5A_EdgeMount 61.5,34.82 r0 top value=SMA
P20 "Comment" PinSocket_2x11_P2.54mm_Vertical_Flipped 173.03,39.87 r180 top value=HEADER_2x11
P22 "Comment" PinSocket_2x13_P2.54mm_Vertical_Flipped 167.95,32.25 r270 top value=HEADER_2x13
P26 "Comment" PinHeader_2x05_P1.27mm_Vertical 160.55,69.445 r270 top value=LPC_JTAG
P28 "Comment" PinSocket_2x11_P2.54mm_Vertical_Flipped 124.77,39.87 r180 top value=HEADER_2x11
Q1 "Comment" SOT-563 74.65,31.72 r0 top value=NMOS/PMOS
Q3 "Comment" SOT-23-3 79,65.62 r270 top value=PMOS
Q4 "Comment" SOT-23-3 174.038,80.82 r180 top value=PMOS
Q5 "Comment" SOT-23-3 160.763,78.82 r0 top value=PMOS
Q6 "Comment" SOT-23-3 147.7,63.02 r0 top value=PMOS
Q7 "Comment" SOT-363_SC-70-6 151.5,65.52 r180 top value=2NPN
Q9 "Comment" SOT-363_SC-70-6 175.1,84.02 r180 top value=2PNP
Q10 "Comment" SOT-363_SC-70-6 175.1,86.82 r180 top value=2NPN
R1 "Comment" R_0201_0603Metric 81.7,57.82 r0 top value=470
R2 "Comment" R_0201_0603Metric 81.7,58.52 r180 top value=470
R3 "Comment" R_0201_0603Metric 83.5,58.22 r90 top value=22.6k
R4 "Comment" R_0201_0603Metric 85.4,57.42 r270 top value=51k
R5 "Comment" R_0402_1005Metric 90.55,57.87 r90 top value=10k
R6 "Comment" R_0201_0603Metric 142.5,36.82 r180 top value=100
R7 "Comment" R_0402_1005Metric 66.7,65.32 r270 top value=10k
R8 "Comment" R_0201_0603Metric 99.4,47.87 r270 top value=0
R9 "Comment" R_0201_0603Metric 100.4,47.87 r270 top value=0
R10 "Comment" R_0201_0603Metric 102.7,46.27 r270 top value=0
R11 "Comment" R_0201_0603Metric 76.1,68.17 r0 top value=22.6k
R12 "Comment" R_0201_0603Metric 126.2,37.22 r0 top value=33
R13 "Comment" R_0201_0603Metric 103.7,46.27 r270 top value=0
R14 "Comment" R_0201_0603Metric 103.7,43.96 r270 top value=DNP
R15 "Comment" R_0201_0603Metric 102.7,43.96 r270 top value=DNP
R16 "Comment" R_0201_0603Metric 100.4,45.56 r270 top value=DNP
R17 "Comment" R_0201_0603Metric 99.4,45.56 r270 top value=DNP
R18 "Comment" R_0201_0603Metric 63.3,62.32 r0 top value=22.6k
R19 "Comment" R_0201_0603Metric 68.4,77.92 r90 top value=33
R20 "Comment" R_0402_1005Metric 72.75,30.22 r90 top value=180k
R21 "Comment" R_0201_0603Metric 142.8,60.92 r270 top value=100
R22 "Comment" R_0201_0603Metric 176.45,79.97 r270 top value=33k
R23 "Comment" R_0201_0603Metric 122.1,33.17 r0 top value=33
R24 "Comment" R_0201_0603Metric 112.45,31.47 r0 top value=1k
R25 "Comment" R_0201_0603Metric 108.2,30.52 r180 top value=750
R26 "Comment" R_0201_0603Metric 107.15,30.17 r90 top value=1.2k
R27 "Comment" R_0402_1005Metric 137.85,35.67 r0 top value=1.8k
R28 "Comment" R_0402_1005Metric 137.85,34.67 r0 top value=1.8k
R29 "Comment" R_0201_0603Metric 72.6,31.92 r270 top value=100
R30 "Comment" R_0201_0603Metric 67.8,65.32 r90 top value=33
R31 "Comment" R_0201_0603Metric 125,36.52 r0 top value=33
R32 "Comment" R_0201_0603Metric 120.8,30.82 r0 top value=33
R33 "Comment" R_0201_0603Metric 135.2,28.42 r270 top value=10
R34 "Comment" R_0201_0603Metric 122.45,35.32 r0 top value=33
R35 "Comment" R_0201_0603Metric 71.55,31.87 r90 top value=1k
R36 "Comment" R_0402_1005Metric 75.15,27.22 r270 top value=10k
R37 "Comment" R_0402_1005Metric 161.5,54.42 r0 top value=10k
R38 "Comment" R_0402_1005Metric 160.9,50.02 r180 top value=180k
R39 "Comment" R_0402_1005Metric 160.9,49.02 r0 top value=37.4k
R40 "Comment" R_0402_1005Metric 136.9,56.62 r270 top value=10k
R41 "Comment" R_0201_0603Metric 126.9,36.52 r180 top value=33
R42 "Comment" R_0201_0603Metric 79,27.67 r90 top value=220
R43 "Comment" R_0201_0603Metric 89.65,52.42 r90 top value=220
R44 "Comment" R_0402_1005Metric 141.5,61.12 r0 top value=10k
R45 "Comment" R_0402_1005Metric 135.9,56.62 r270 top value=1.8k
R46 "Comment" R_0402_1005Metric 162.2,81.02 r180 top value=180k
R47 "Comment" R_0402_1005Metric 162.2,82.02 r0 top value=180k
R48 "Comment" R_0402_1005Metric 165.4,42.94 r270 top value=10k
R49 "Comment" R_0402_1005Metric 67.4,77.92 r90 top value=10k
R50 "Comment" R_0402_1005Metric 63.3,79.12 r0 top value=10k
R51 "Comment" R_0201_0603Metric 160.2,81.22 r90 top value=4.7k
R52 "Comment" R_0402_1005Metric 170.2,81.32 r0 top value=10k
R53 "Comment" R_0402_1005Metric 151.8,68.12 r270 top value=1.8k
R54 "Comment" R_0201_0603Metric 166.3,89.02 r180 top value=4.7k
R55 "Comment" R_0402_1005Metric 170.2,83.32 r180 top value=180k
R56 "Comment" R_0402_1005Metric 170.2,82.32 r0 top value=820k
R57 "Comment" R_0201_0603Metric 160.9,81.22 r90 top value=33k
R58 "Comment" R_0402_1005Metric 176.6,81.62 r270 top value=820k
R59 "Comment" R_0402_1005Metric 155.6,37.32 r180 top value=10k
R60 "Comment" R_0402_1005Metric 78.75,68.17 r180 top value=5.1k
R61 "Comment" R_0201_0603Metric 145.3,62.02 r90 top value=22.6k
R62 "Comment" R_0402_1005Metric 166.5,76.62 r0 top value=10k
R63 "Comment" R_0402_1005Metric 156.1,65.82 r0 top value=10k
R64 "Comment" R_0402_1005Metric 149.4,53.82 r90 top value=10k
R65 "Comment" R_0402_1005Metric 166.51,75.62 r180 top value=18k
R66 "Comment" R_0402_1005Metric 156.1,64.82 r0 top value=10k
R67 "Comment" R_0402_1005Metric 145.6,54.32 r180 top value=10k
R68 "Comment" R_0402_1005Metric 145.6,55.32 r180 top value=10k
R69 "Comment" R_0201_0603Metric 151.9,54.22 r180 top value=12k
R70 "Comment" R_0402_1005Metric 159.2,75.12 r90 top value=820k
R71 "Comment" R_0402_1005Metric 149.4,65.72 r90 top value=5.1k
R72 "Comment" R_0201_0603Metric 63.3,56.52 r0 top value=470
R73 "Comment" R_0402_1005Metric 63.3,53.12 r0 top value=3k
R74 "Comment" R_0201_0603Metric 63.3,48.52 r0 top value=4.7k
R75 "Comment" R_0402_1005Metric 63.3,78.12 r0 top value=10k
R76 "Comment" R_0201_0603Metric 63.3,65.72 r0 top value=4.7k
R77 "Comment" R_0201_0603Metric 164.7,75.42 r270 top value=2.2k
R78 "Comment" R_0201_0603Metric 161.75,74.42 r270 top value=2.2k
R79 "Comment" R_0402_1005Metric 164.2,76.62 r180 top value=5.1k
R80 "Comment" R_0402_1005Metric 162.3,75.62 r0 top value=5.1k
R81 "Comment" R_0201_0603Metric 177.45,83.97 r0 top value=33k
R82 "Comment" R_0402_1005Metric 161.5,53.42 r180 top value=18k
R83 "Comment" R_0201_0603Metric 177.45,86.82 r0 top value=33k
R84 "Comment" R_0201_0603Metric 122.1,33.97 r0 top value=33
R85 "Comment" R_0402_1005Metric 129.3,30.57 r180 top value=10k
R86 "Comment" R_0201_0603Metric 177.45,84.67 r180 top value=33k
R87 "Comment" R_0201_0603Metric 177.45,87.52 r180 top value=33k
R88 "Comment" R_0402_1005Metric 177.7,83.12 r0 top value=18.7k
R89 "Comment" R_0402_1005Metric 177.6,80.52 r270 top value=18.7k
R90 "Comment" R_0402_1005Metric 160.3,75.12 r90 top value=18.7k
R91 "Comment" R_0402_1005Metric 162.3,76.62 r0 top value=18.7k
R92 "Comment" R_0201_0603Metric 112.45,30.77 r180 top value=4.7k
R93 "Comment" R_0402_1005Metric 151.8,37.32 r180 top value=10k
R94 "Comment" R_0201_0603Metric 110.1,27.22 r90 top value=1k
R95 "Comment" R_0201_0603Metric 110.8,27.22 r270 top value=4.7k
R96 "Comment" R_0201_0603Metric 116.1,29.72 r270 top value=1k
R97 "Comment" R_0201_0603Metric 115.4,29.72 r90 top value=4.7k
R98 "Comment" R_0201_0603Metric 89.9,26.22 r0 top value=1k
R99 "Comment" R_0201_0603Metric 91.3,26.22 r0 top value=4.7k
R100 "Comment" R_0402_1005Metric 157.6,24.92 r180 top value=10k
R101 "Comment" R_0402_1005Metric 163.1,25.82 r0 top value=100k
R102 "Comment" R_0201_0603Metric 110.5,46.12 r0 top value=330
R103 "Comment" R_0201_0603Metric 164.35,58.92 r90 top value=4.7k
R104 "Comment" R_0402_1005Metric 125.4,28.62 r90 top value=10k
R105 "Comment" R_0402_1005Metric 129.3,31.52 r180 top value=10k
R106 "Comment" R_0201_0603Metric 165.05,58.92 r90 top value=4.7k
R107 "Comment" R_0201_0603Metric 161.5,55.42 r0 top value=4.7k
R108 "Comment" R_0201_0603Metric 135.2,29.82 r90 top value=33
R109 "Comment" R_0201_0603Metric 99.6,31.62 r90 top value=4.7k
R110 "Comment" R_0201_0603Metric 116.1,46.12 r0 top value=330
R111 "Comment" R_0201_0603Metric 114.7,46.12 r180 top value=330
R112 "Comment" R_0201_0603Metric 109.1,46.12 r180 top value=330
R113 "Comment" R_0402_1005Metric 106.25,43.62 r90 top value=10k
R114 "Comment" R_0201_0603Metric 80.75,31.97 r180 top value=1k
R115 "Comment" R_0201_0603Metric 79.2,29.67 r0 top value=470
R116 "Comment" R_0201_0603Metric 78.3,27.67 r270 top value=470
R117 "Comment" R_0201_0603Metric 83.7,29.37 r0 top value=470
R118 "Comment" R_0201_0603Metric 103.2,45.12 r180 top value=DNP